# Altium PCB pcb.PCBDOC (part 1 of 2)
Units mil, origin at the board's own origin, x right, y up, seen from the top; angles counter-clockwise.
Board outline 6250 x 3000 mil, 6 copper layers (Top Layer, Mid-Layer 1, Internal Plane 1, Internal Plane 2, Mid-Layer 2, Bottom Layer); 199 components, 348 nets, 1713 pads, 133 vias.
Unrouted connection lines stored in the file: 1010.
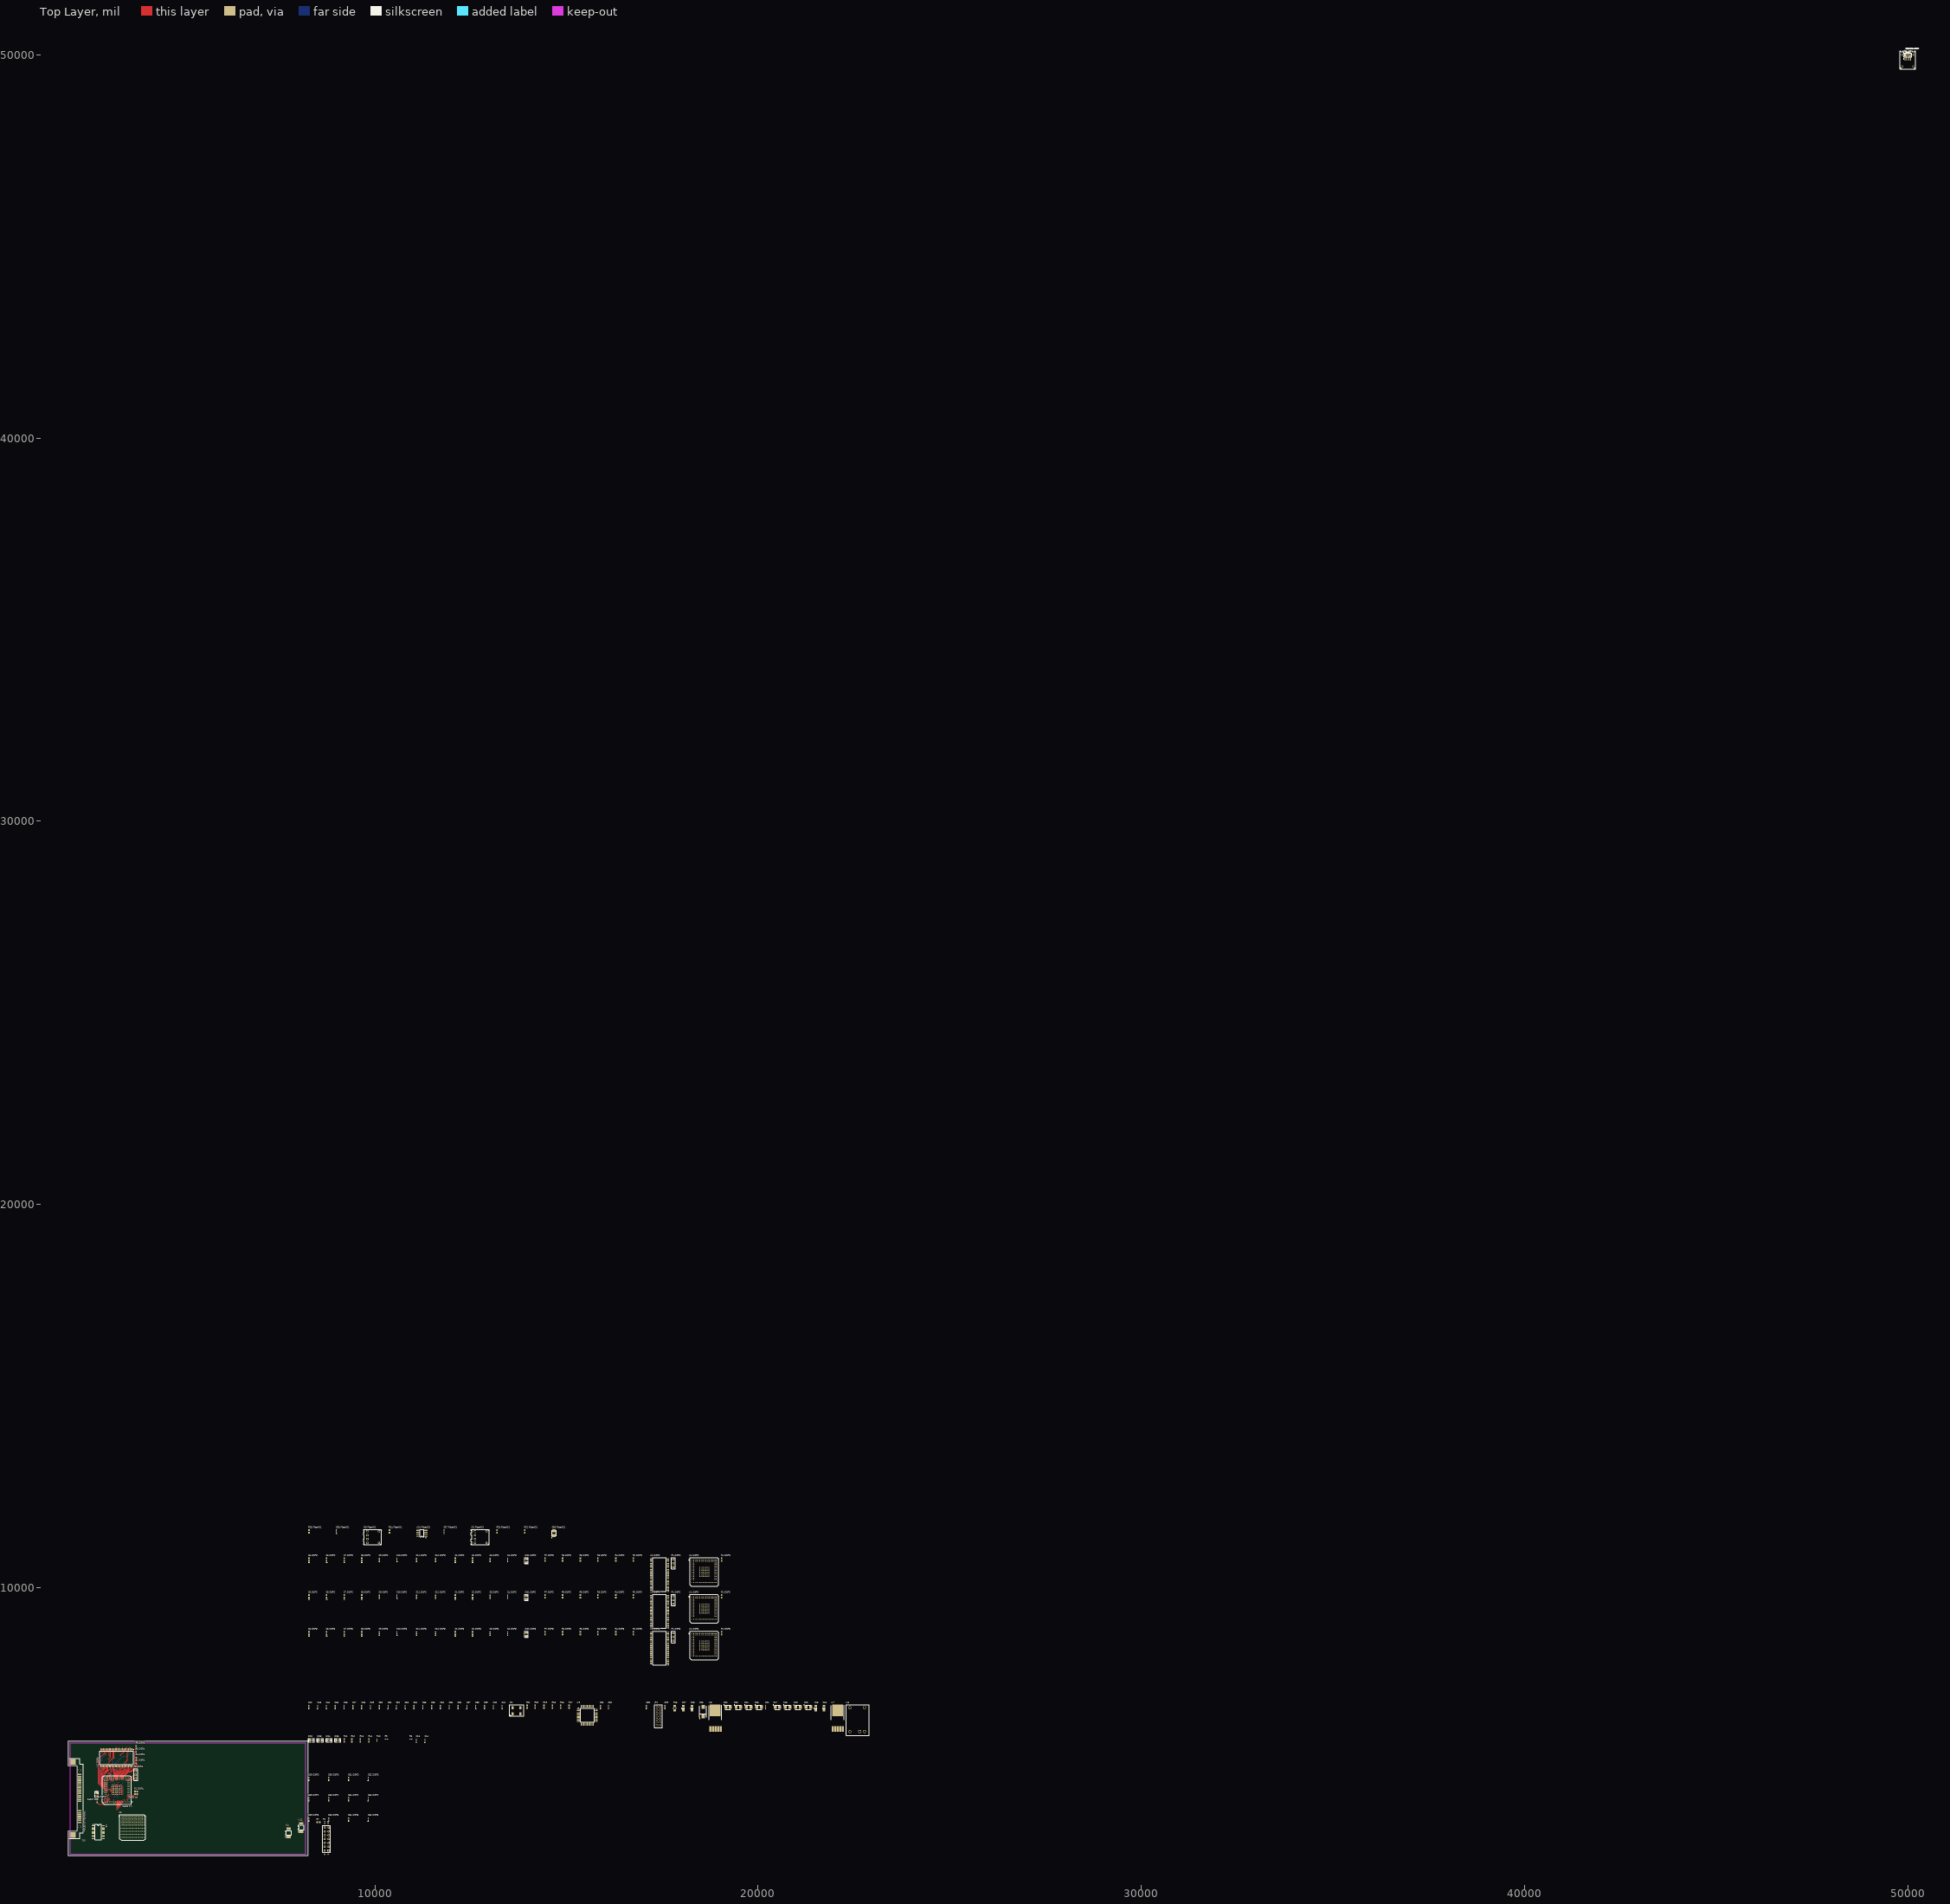
[diagram p0: Top Layer view]
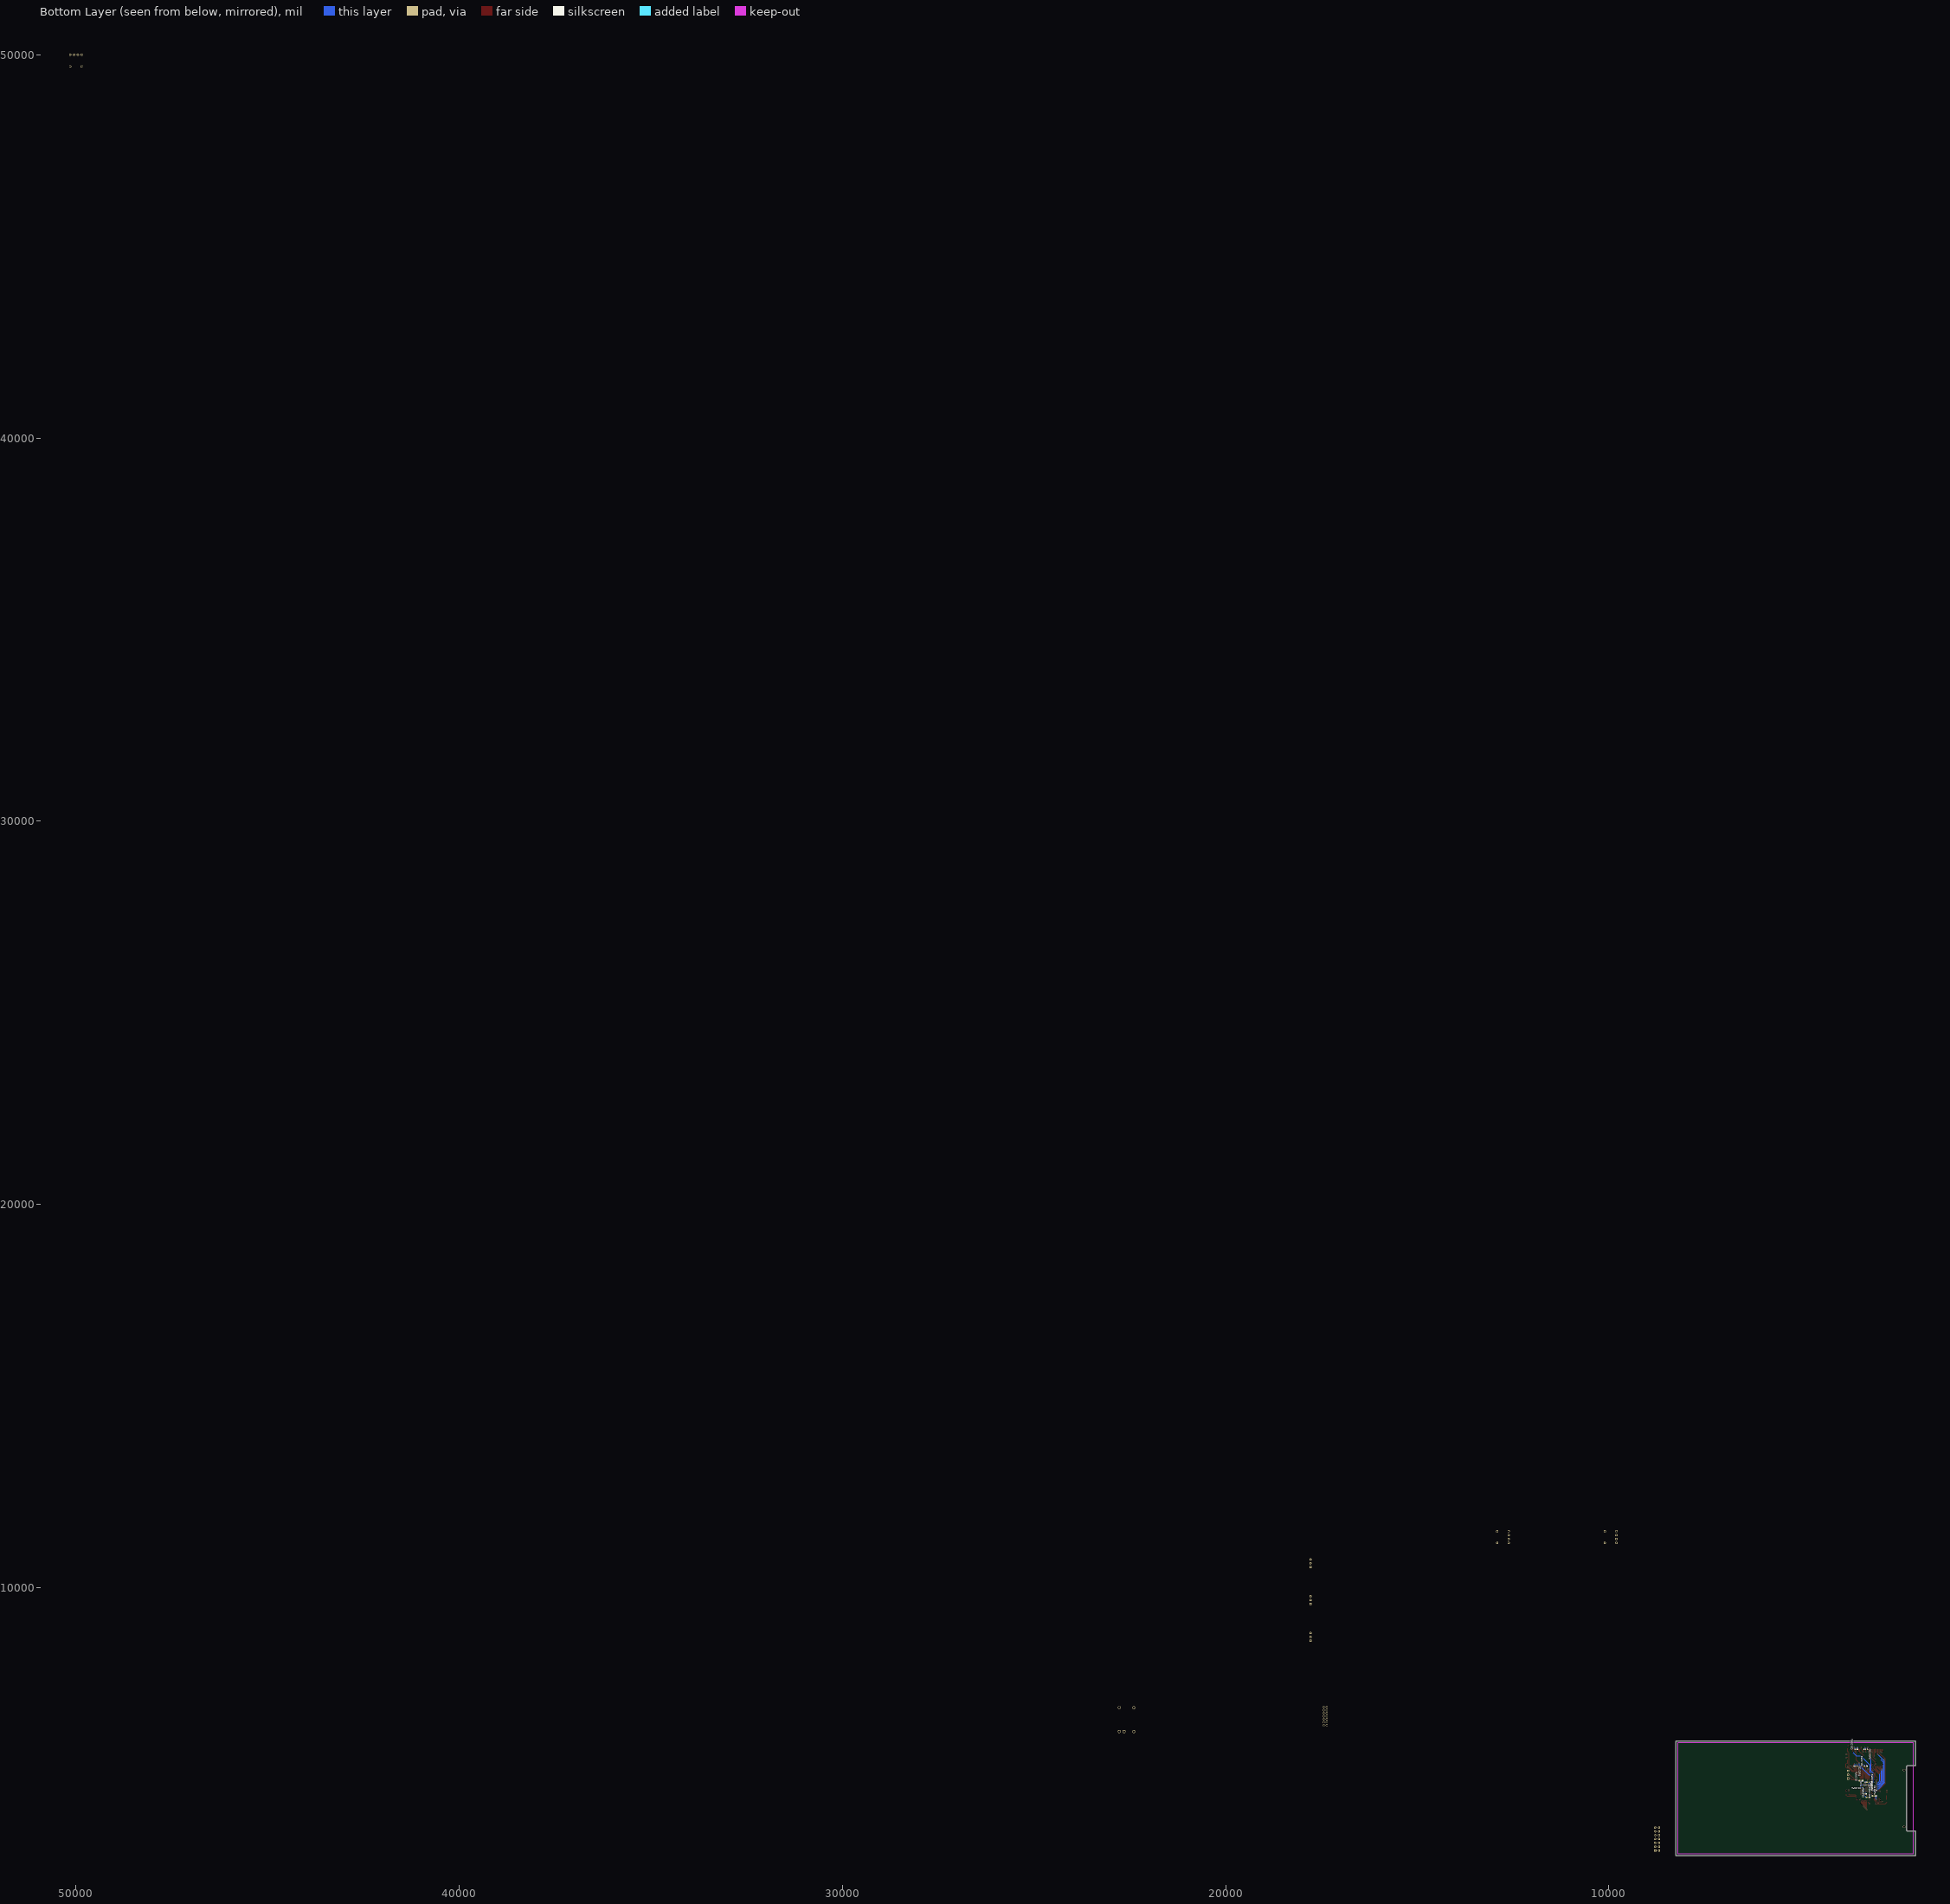
[diagram p1: Bottom Layer view, seen from below]
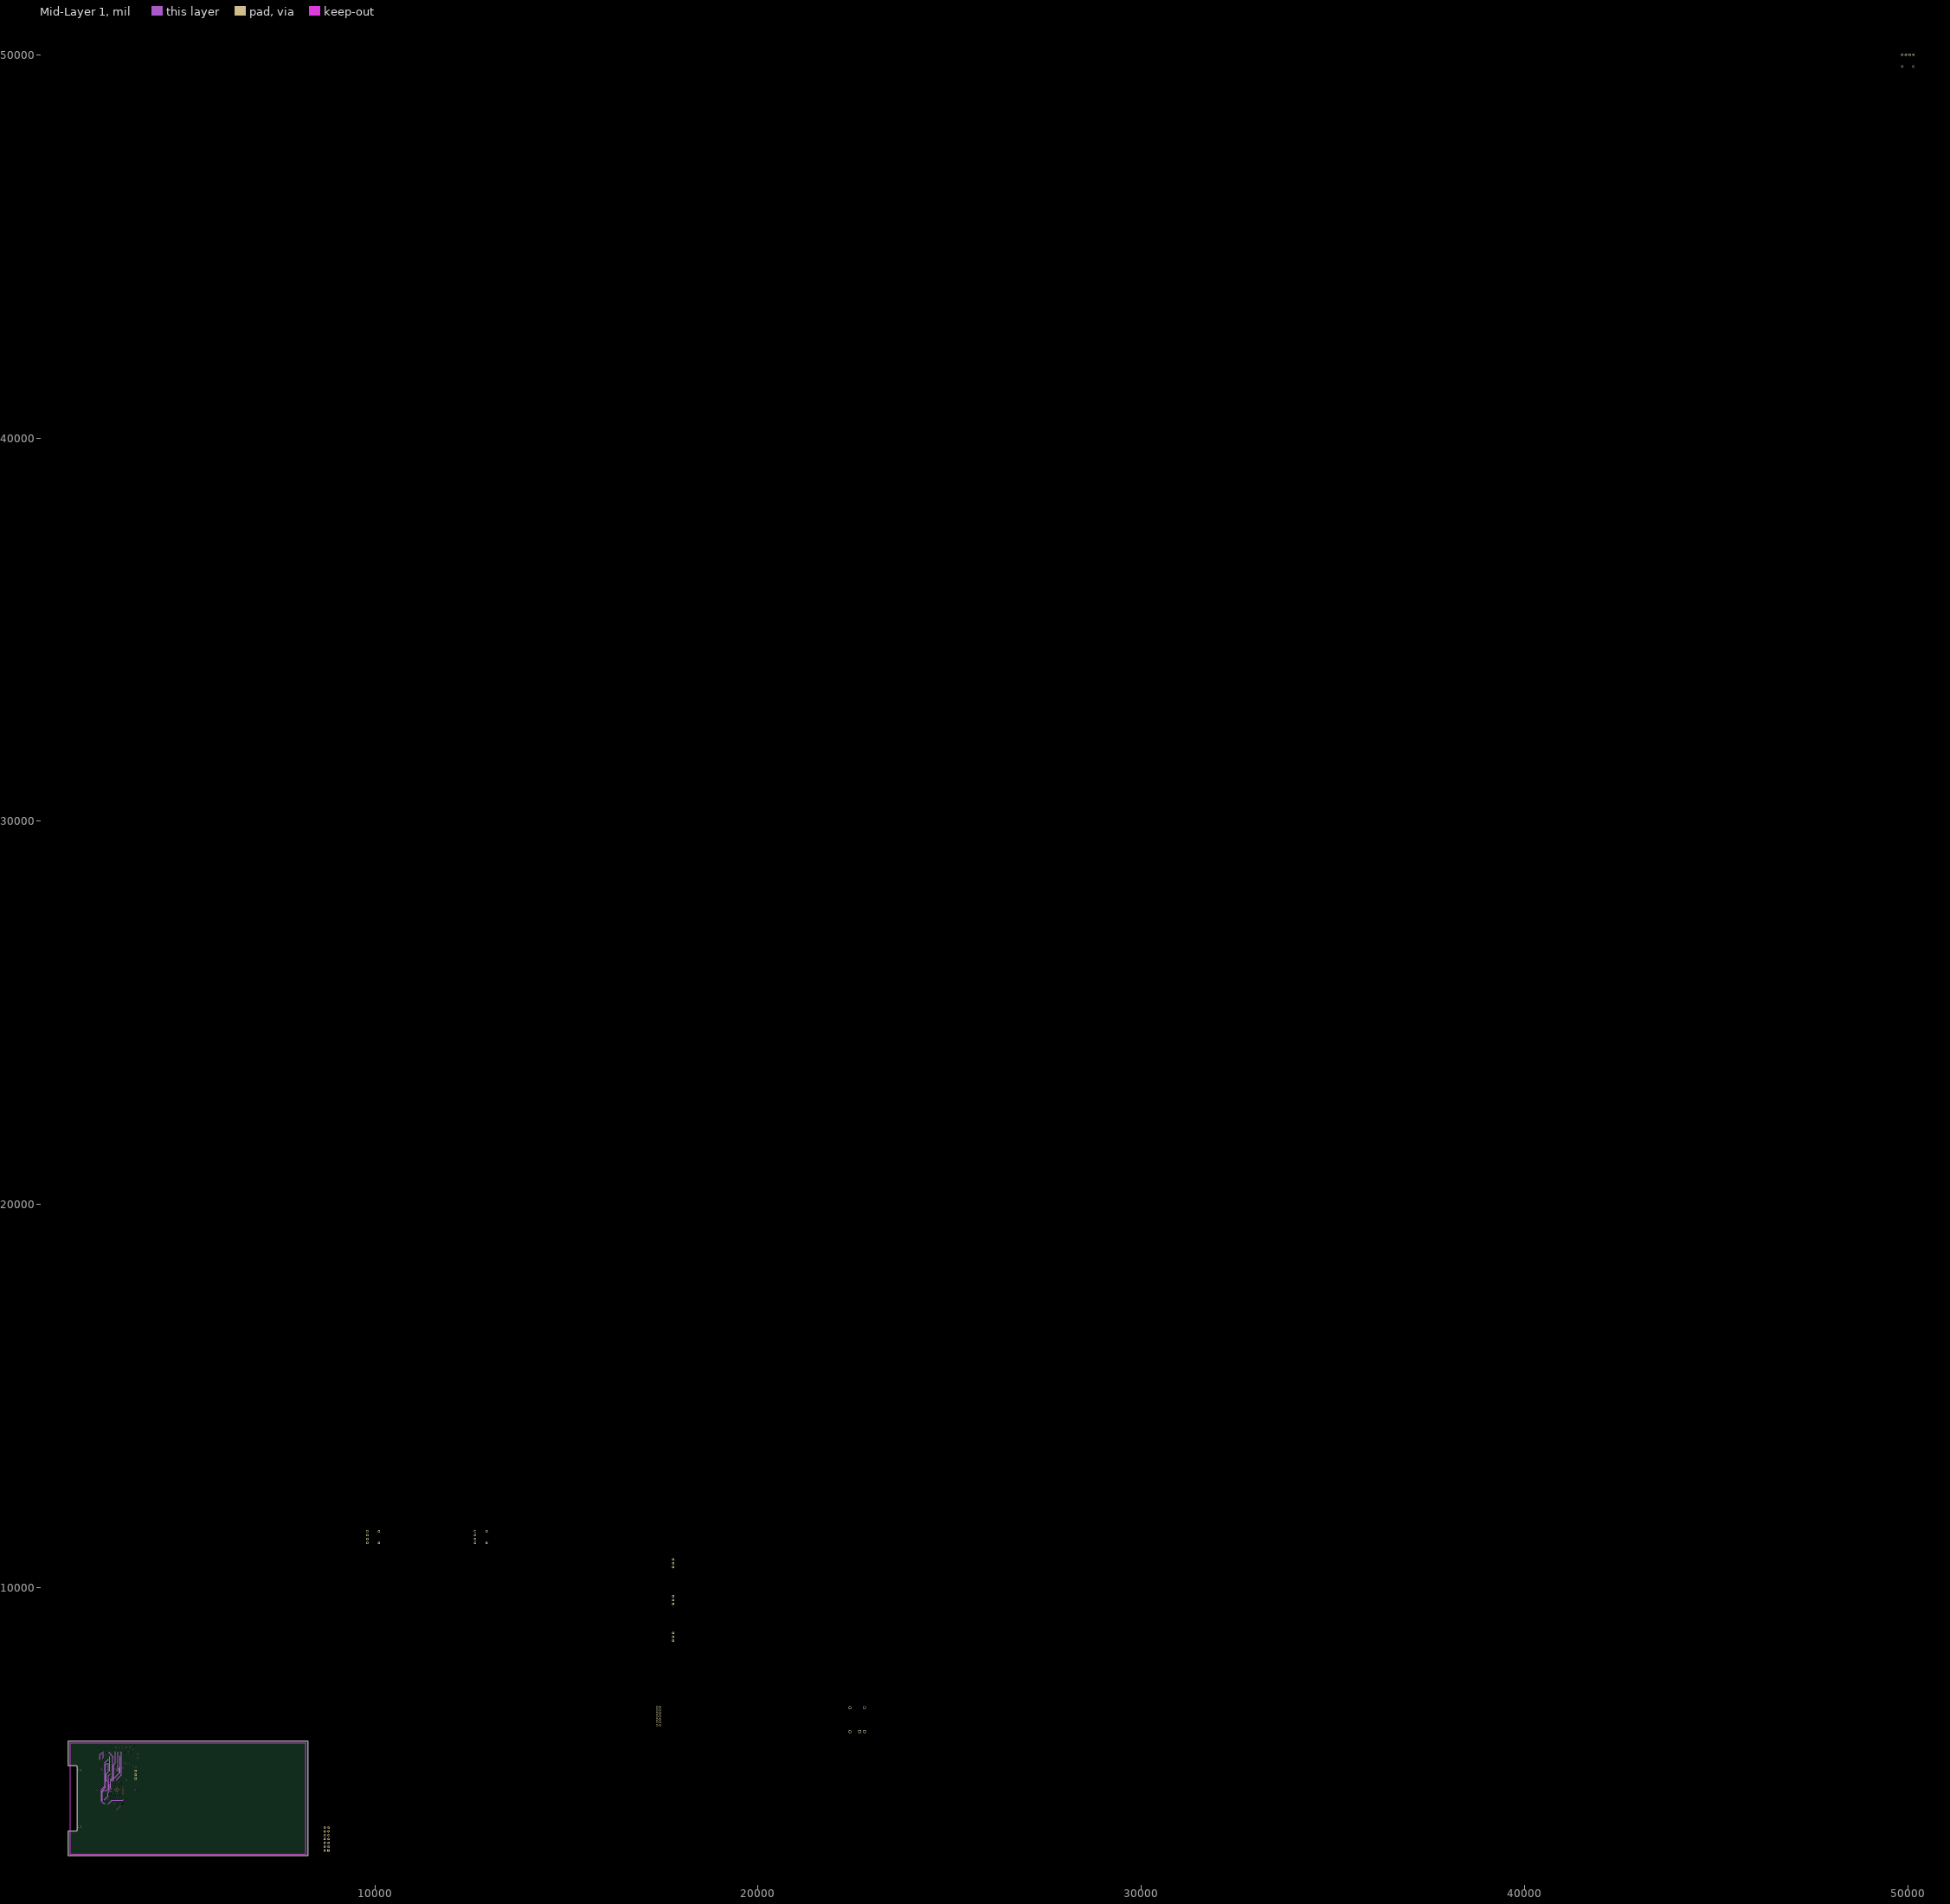
[diagram p2: Mid-Layer 1]
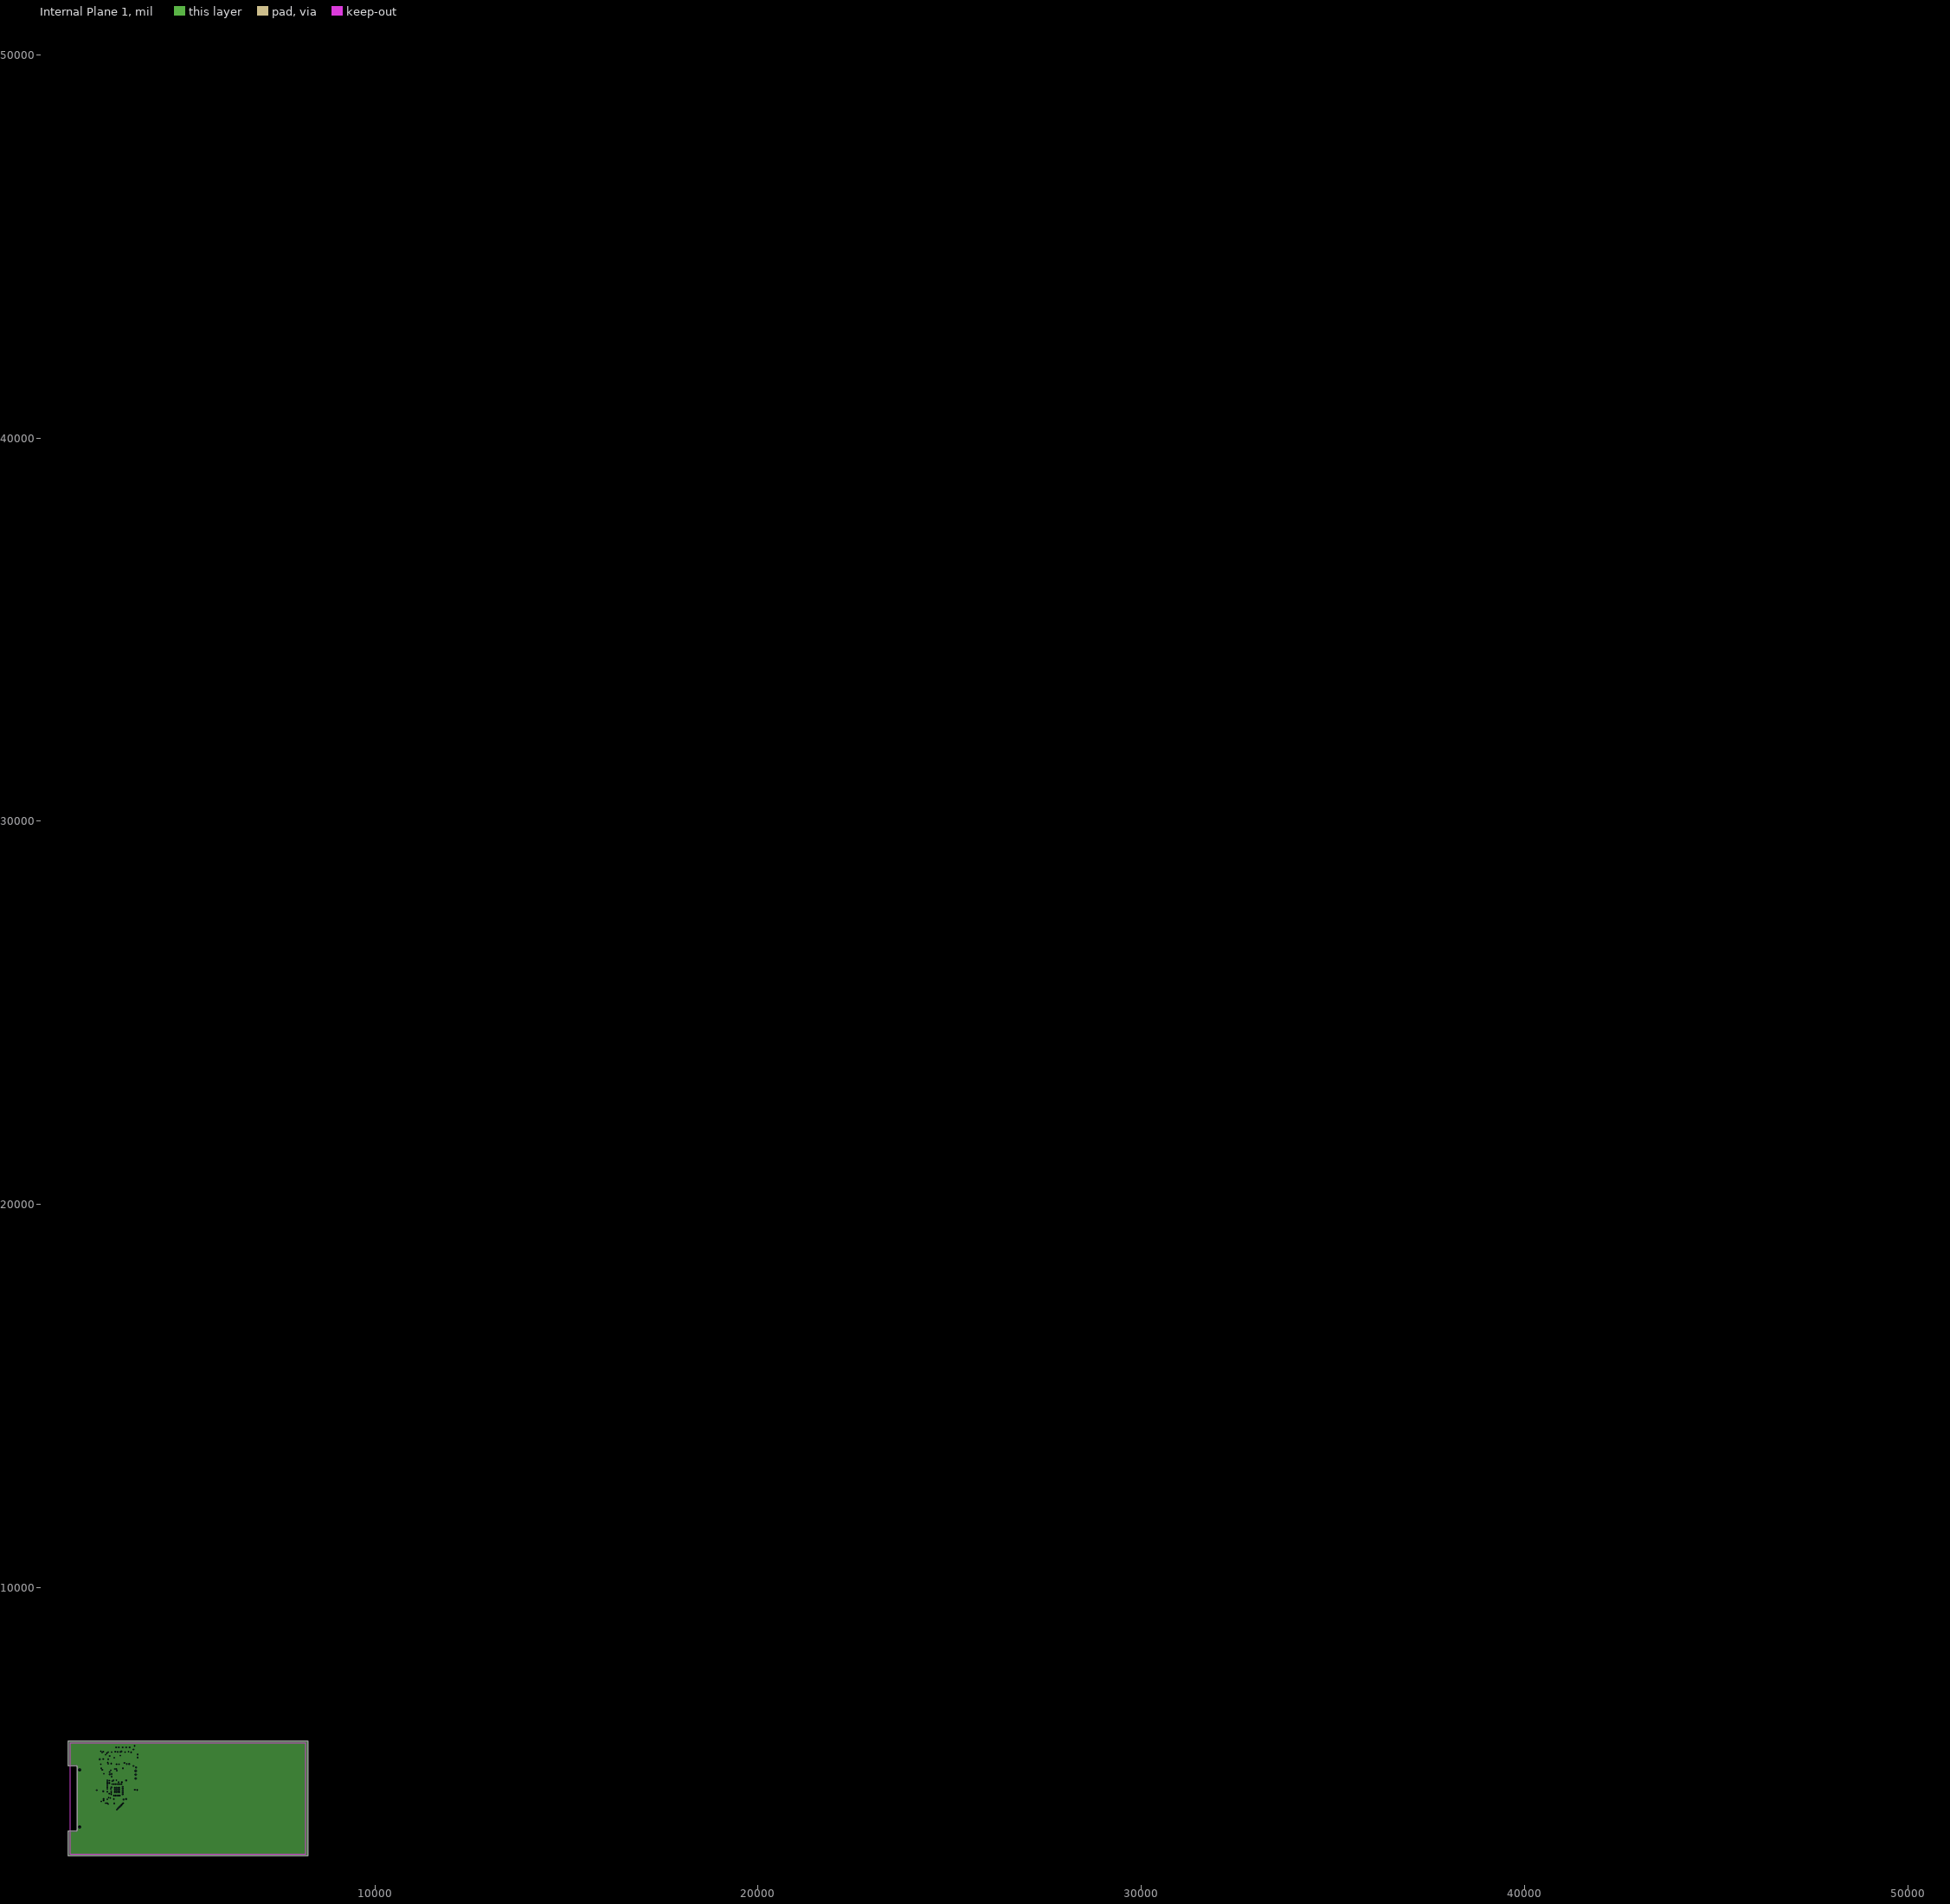
[diagram p3: Internal Plane 1, clearances drawn from the general rule]
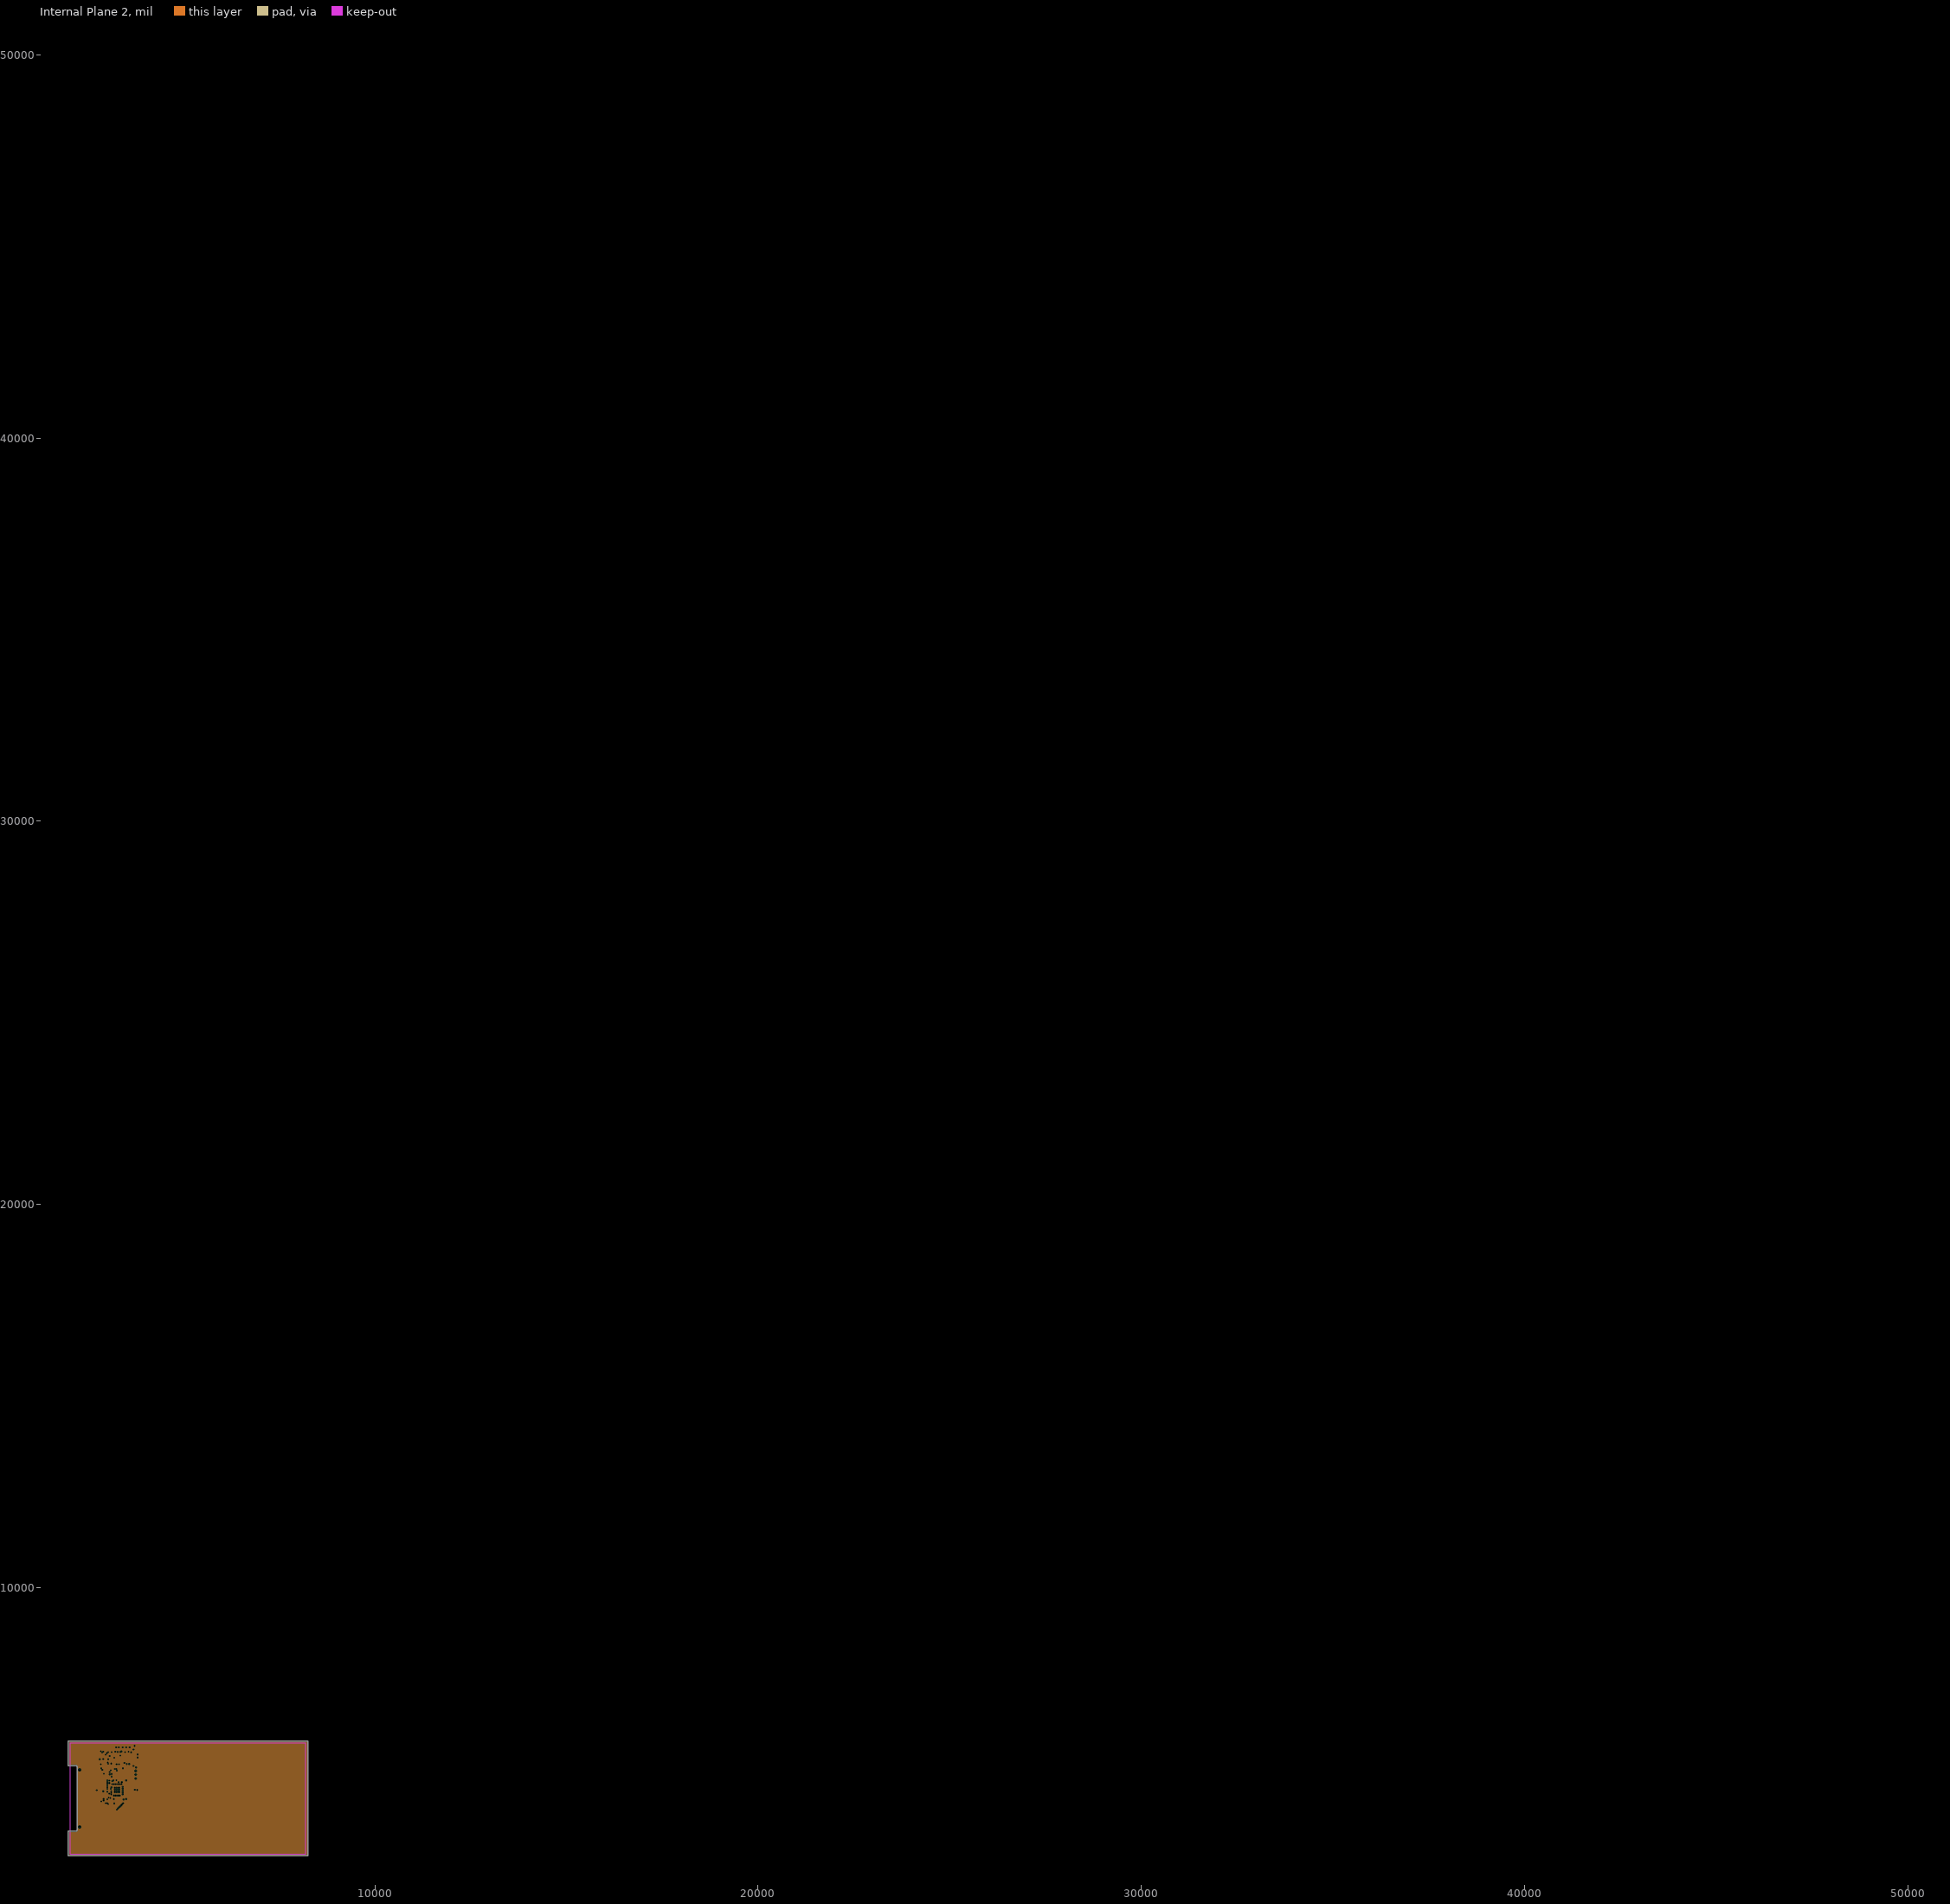
[diagram p4: Internal Plane 2, clearances drawn from the general rule]
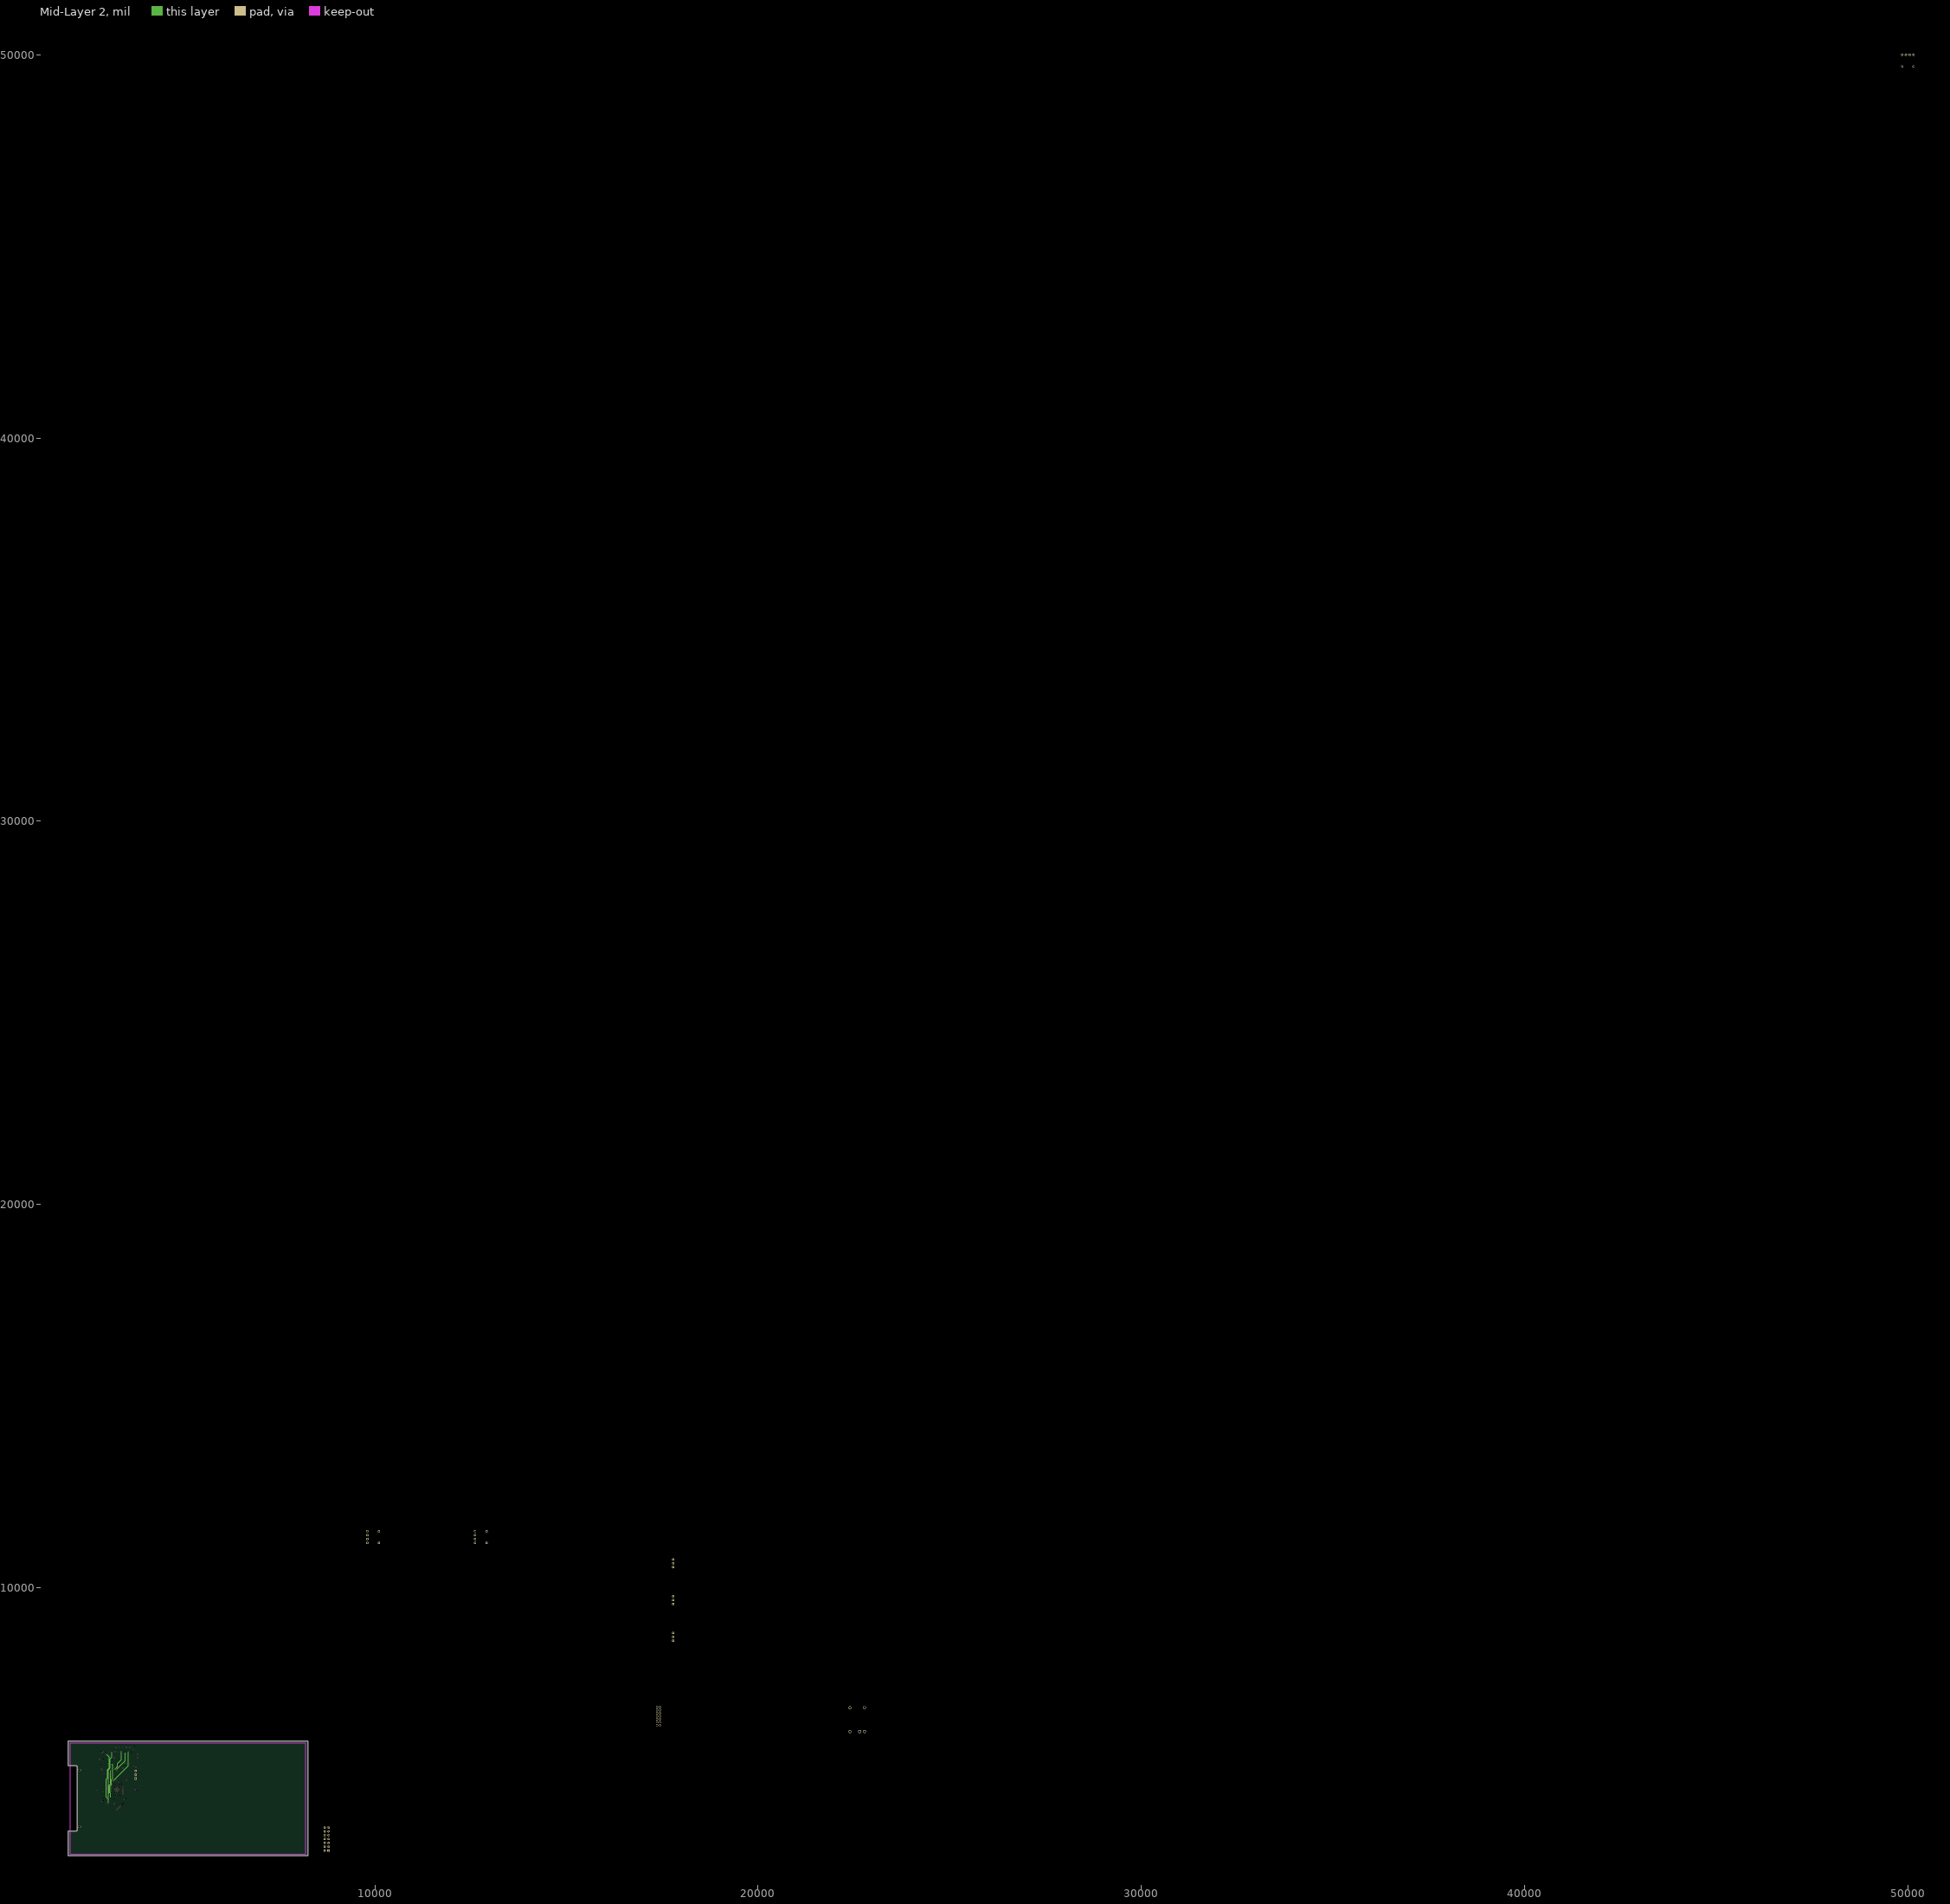
[diagram p5: Mid-Layer 2]

## Layer stack, top to bottom
Top Layer: signal copper 1.4
Dielectric: dielectric 12.6, FR-4, Dk 4.8
Mid-Layer 1: signal copper 1.4
Dielectric: dielectric 12.6, FR-4, Dk 4.8
Internal Plane 1: plane copper 1.4
Dielectric: dielectric 12.6, FR-4, Dk 4.8
Internal Plane 2: plane copper 1.4
Dielectric: dielectric 12.6, FR-4, Dk 4.8
Mid-Layer 2: signal copper 1.4
Dielectric: dielectric 12.6, FR-4, Dk 4.8
Bottom Layer: signal copper 1.4

## Board outline
2000,3000 2000,3643.11 2194.88,3643.11 ccw(c2194.88,3682.48) 2234.25,3682.48 2234.25,5317.52 ccw(c2194.88,5317.52) 2194.88,5356.89 2000,5356.89 2000,6000 8250,6000 8250,3000

## Design rules (kind name [scope] priority, off if disabled: settings)
Clearance [All] p1: gap=6
ComponentClearance [All] p1: gap=10 collisioncheckmode=3 verticalgap=10
HoleSize [All] p1: absolutevalues=TRUE maxlimit=200 minlimit=1 maxpercent=80.000 minpercent=20.000
PlaneClearance [All] p1: clearance=20
PlaneConnect [All] p1: planeconnectstyle=Relief reliefexpansion=20 reliefentries=4 reliefconductorwidth=10 reliefairgap=10
PolygonConnect [All] p1: connectstyle=Relief reliefconductorwidth=10 reliefentries=4 polygonreliefangle="90 Angle"
RoomDefinition FPGA [InComponentClass('FPGA')] p1: confinementstyle=ConfineIn formatcopy=TRUE lockcomponents=FALSE outline 8250,3005 9065,3005 9065,4010 8250,4010
RoomDefinition FiberIO1 [InComponentClass('FiberIO1')] p2: confinementstyle=ConfineIn formatcopy=TRUE lockcomponents=FALSE outline 8250,11110 15285,11110 15285,11630 8250,11630
RoomDefinition FiberIO2 [InComponentClass('FiberIO2')] p3: confinementstyle=ConfineIn formatcopy=TRUE lockcomponents=FALSE outline 49785,49615 50625,49615 50625,50215 49785,50215
RoomDefinition IO [InComponentClass('IO')] p4: confinementstyle=ConfineIn formatcopy=TRUE lockcomponents=FALSE outline 8250,3960 11950,3960 11950,6175 8250,6175
RoomDefinition PC [InComponentClass('PC')] p5: confinementstyle=ConfineIn formatcopy=TRUE lockcomponents=FALSE outline 8250,6135 22910,6135 22910,7055 8250,7055
RoomDefinition DSPA [InComponentClass('DSPA')] p6: confinementstyle=ConfineIn formatcopy=TRUE lockcomponents=FALSE outline 2690,4188.98 3835,4188.98 3835,5935 2690,5935
RoomDefinition DSPB [InComponentClass('DSPB')] p7: confinementstyle=ConfineIn formatcopy=TRUE lockcomponents=FALSE outline 8250,7965 19430,7965 19430,8975 8250,8975
RoomDefinition DSPC [InComponentClass('DSPC')] p8: confinementstyle=ConfineIn formatcopy=TRUE lockcomponents=FALSE outline 8250,8925 19430,8925 19430,9935 8250,9935
RoomDefinition DSPD [InComponentClass('DSPD')] p9: confinementstyle=ConfineIn formatcopy=TRUE lockcomponents=FALSE outline 8250,9885 19430,9885 19430,10895 8250,10895
RoutingVias [All] p1: holewidth=10 width=24 viastyle="Through Hole" minholewidth=10 minwidth=24 maxholewidth=28 maxwidth=50
SolderMaskExpansion [All] p1: expansion=4
TestPointUsage [All] p1: valid=0 allowmultiple=FALSE
Testpoint [All] p1: side=15 testpointundercomponent=TRUE minsize=40 maxsize=100 preferedsize=60 minholesize=0 maxholesize=40 preferedholesize=32 testpointgrid=1 style=1023 order=0123456789
Width [All] p1: maxlimit=50 minlimit=6 preferedwidth=8 toplayer_prefwidth=6 midlayer1_prefwidth=7 midlayer2_prefwidth=7 bottomlayer_prefwidth=7 minimp=50.000000 maximp=50.000000 favimp=50.000000
14 further rules are at their usual default settings.

## Classes and differential pairs
component class DSPD: C1.DSPD C2.DSPD C3.DSPD C4.DSPD C5.DSPD C6.DSPD C7.DSPD C8.DSPD C9.DSPD C10.DSPD C11.DSPD C12.DSPD C59.DSPD C60.DSPD C61.DSPD C62.DSPD DS1.DSPD P1.DSPD R1.DSPD R2.DSPD R3.DSPD R4.DSPD R5.DSPD R6.DSPD R7.DSPD U1.DSPD U2.DSPD
component class DSPC: C1.DSPC C2.DSPC C3.DSPC C4.DSPC C5.DSPC C6.DSPC C7.DSPC C8.DSPC C9.DSPC C10.DSPC C11.DSPC C12.DSPC C59.DSPC C60.DSPC C61.DSPC C62.DSPC DS1.DSPC P1.DSPC R1.DSPC R2.DSPC R3.DSPC R4.DSPC R5.DSPC R6.DSPC R7.DSPC U1.DSPC U2.DSPC
component class DSPB: C1.DSPB C2.DSPB C3.DSPB C4.DSPB C5.DSPB C6.DSPB C7.DSPB C8.DSPB C9.DSPB C10.DSPB C11.DSPB C12.DSPB C59.DSPB C60.DSPB C61.DSPB C62.DSPB DS1.DSPB P1.DSPB R1.DSPB R2.DSPB R3.DSPB R4.DSPB R5.DSPB R6.DSPB R7.DSPB U1.DSPB U2.DSPB
component class DSPA: C1.DSPA C2.DSPA C3.DSPA C4.DSPA C5.DSPA C6.DSPA C7.DSPA C8.DSPA C9.DSPA C10.DSPA C11.DSPA C12.DSPA C59.DSPA C60.DSPA C61.DSPA C62.DSPA DS1.DSPA P1.DSPA R1.DSPA R2.DSPA R3.DSPA R4.DSPA R5.DSPA R6.DSPA R7.DSPA U1.DSPA U2.DSPA
channel class fiber: FiberIO1 FiberIO2
component class PC: C15 C16 C17 C18 C19 C20 C21 C22 C23 C24 C25 C26 C27 C28 C29 C30 C31 C32 C33 C34 C35 C36 C37 C38 C39 C40 C41 C42 C43 C44 C45 C46 C47 C48 C49 C50 C51 C52 C53 C54 C55 JP1 O1 R15 R16 R17 R18 R19 R20 R21 U3 U6 U7 U8 U9
component class IO: C13 C14 DS2 DS3 DS4 DS5 IO1 R8 R9 R10 R11 R12 R13 R14 U5
component class FiberIO2: C56.FiberIO2 C57.FiberIO2 C58.FiberIO2 O2.FiberIO2 O3.FiberIO2 R22.FiberIO2 R23.FiberIO2 R24.FiberIO2 R25.FiberIO2 U10.FiberIO2
component class FiberIO1: C56.FiberIO1 C57.FiberIO1 C58.FiberIO1 O2.FiberIO1 O3.FiberIO1 R22.FiberIO1 R23.FiberIO1 R24.FiberIO1 R25.FiberIO1 U10.FiberIO1
channel class DSP: DSPA DSPB DSPC DSPD
net class PPI[0..7]: PPI0 PPI1 PPI2 PPI3 PPI4 PPI5 PPI6 PPI7
component class FPGA: P2 R7 U4 U11

## Components (designator, comment, footprint, x,y, rotation, side; value= is the part's Value field where it differs from the comment)
C1.DSPA "Cap" CC1608-0603 3238.19,4921.26 r180 bottom (schematic designator C1)
C1.DSPB "Cap" CC1608-0603 12100,8810 r90 top (schematic designator C1)
C1.DSPC "Cap" CC1608-0603 12100,9770 r90 top (schematic designator C1)
C1.DSPD "Cap" CC1608-0603 12100,10730 r90 top (schematic designator C1)
C2.DSPA "Cap" CC1608-0603 3082.61,4566.93 r0 bottom (schematic designator C2)
C2.DSPB "Cap" CC1608-0603 12550,8810 r90 top (schematic designator C2)
C2.DSPC "Cap" CC1608-0603 12550,9770 r90 top (schematic designator C2)
C2.DSPD "Cap" CC1608-0603 12550,10730 r90 top (schematic designator C2)
C3.DSPA "Cap" CC1005-0402 3157.54,4822.83 r180 bottom (schematic designator C3)
C3.DSPB "Cap" CC1005-0402 13005,8820 r90 top (schematic designator C3)
C3.DSPC "Cap" CC1005-0402 13005,9780 r90 top (schematic designator C3)
C3.DSPD "Cap" CC1005-0402 13005,10740 r90 top (schematic designator C3)
C4.DSPA "Cap" CC1005-0402 3053.09,4714.57 r0 bottom (schematic designator C4)
C4.DSPB "Cap" CC1005-0402 13465,8820 r90 top (schematic designator C4)
C4.DSPC "Cap" CC1005-0402 13465,9780 r90 top (schematic designator C4)
C4.DSPD "Cap" CC1005-0402 13465,10740 r90 top (schematic designator C4)
C5.DSPA "Cap" CC1608-0603 3427.1,4960.63 r0 bottom (schematic designator C5)
C5.DSPB "Cap" CC1608-0603 8280,8810 r90 top (schematic designator C5)
C5.DSPC "Cap" CC1608-0603 8280,9770 r90 top (schematic designator C5)
C5.DSPD "Cap" CC1608-0603 8280,10730 r90 top (schematic designator C5)
C6.DSPA "Cap" CC1608-0603 3248.03,4527.56 r0 bottom (schematic designator C6)
C6.DSPB "Cap" CC1608-0603 8740,8810 r90 top (schematic designator C6)
C6.DSPC "Cap" CC1608-0603 8740,9770 r90 top (schematic designator C6)
C6.DSPD "Cap" CC1608-0603 8740,10730 r90 top (schematic designator C6)
C7.DSPB "Cap" CC1608-0603 9200,8810 r90 top (schematic designator C7)
C7.DSPC "Cap" CC1608-0603 9200,9770 r90 top (schematic designator C7)
C7.DSPD "Cap" CC1608-0603 9200,10730 r90 top (schematic designator C7)
C8.DSPB "Cap" CC1608-0603 9660,8810 r90 top (schematic designator C8)
C8.DSPC "Cap" CC1608-0603 9660,9770 r90 top (schematic designator C8)
C8.DSPD "Cap" CC1608-0603 9660,10730 r90 top (schematic designator C8)
C9.DSPA "Cap" CC1005-0402 3425.2,4870.14 r270 bottom (schematic designator C9)
C9.DSPB "Cap" CC1005-0402 10115,8820 r90 top (schematic designator C9)
C9.DSPC "Cap" CC1005-0402 10115,9780 r90 top (schematic designator C9)
C9.DSPD "Cap" CC1005-0402 10115,10740 r90 top (schematic designator C9)
C10.DSPA "Cap" CC1005-0402 3366.14,4746 r90 bottom (schematic designator C10)
C10.DSPB "Cap" CC1005-0402 10575,8820 r90 top (schematic designator C10)
C10.DSPC "Cap" CC1005-0402 10575,9780 r90 top (schematic designator C10)
C10.DSPD "Cap" CC1005-0402 10575,10740 r90 top (schematic designator C10)
C11.DSPB "Cap" CC1005-0402 11085,8820 r90 top (schematic designator C11)
C11.DSPC "Cap" CC1005-0402 11085,9780 r90 top (schematic designator C11)
C11.DSPD "Cap" CC1005-0402 11085,10740 r90 top (schematic designator C11)
C12.DSPA "Cap" CC1005-0402 3326.77,4616.14 r0 bottom (schematic designator C12)
C12.DSPB "Cap" CC1005-0402 11585,8820 r90 top (schematic designator C12)
C12.DSPC "Cap" CC1005-0402 11585,9780 r90 top (schematic designator C12)
C12.DSPD "Cap" CC1005-0402 11585,10740 r90 top (schematic designator C12)
C13 "Cap" CC1005-0402 11080,6020 r90 top
C14 "Cap" CC1005-0402 11305,6020 r90 top
C15 "10uF" CC3216-1206 21500,6855 r90 top
C16 "10uF" CC3216-1206 21720,6855 r90 top
C17 "Bypass Cap" TC3528-1411 20505,6880 r0 top
C18 "Bypass Cap" TC3528-1411 20770,6880 r0 top
C19 "Bypass Cap" TC3528-1411 21040,6880 r0 top
C20 "Bypass Cap" TC3528-1411 21310,6880 r0 top
C21 "Cap" CC1005-0402 20195,6900 r90 top
C22 "Bypass Cap" TC3528-1411 19215,6880 r0 top
C23 "Bypass Cap" TC3528-1411 19485,6880 r0 top
C24 "Bypass Cap" TC3528-1411 19755,6880 r0 top
C25 "Bypass Cap" TC3528-1411 20025,6880 r0 top
C26 "A700D107M006AT" TC7343-2917 18565,6765 r90 top
C27 "10uF" CC3216-1206 18045,6855 r90 top
C28 "10uF" CC3216-1206 18275,6855 r90 top
C29 "Cap" CC1005-0402 17570,6900 r90 top
C30 "Cap" CC1005-0402 17085,6900 r90 top
C31 "Cap" CC1005-0402 15885,6900 r90 top
C32 "Cap" CC1005-0402 16095,6900 r90 top
C33 "Cap" CC1005-0402 11480,6900 r90 top
C34 "Cap" CC1005-0402 11710,6900 r90 top
C35 "Cap" CC1005-0402 11940,6900 r90 top
C36 "Cap" CC1005-0402 12170,6900 r90 top
C37 "Cap" CC1005-0402 12400,6900 r90 top
C38 "Cap" CC1005-0402 12630,6900 r90 top
C39 "Cap" CC1005-0402 12860,6900 r90 top
C40 "Cap" CC1005-0402 13090,6900 r90 top
C41 "Cap" CC1005-0402 13320,6900 r90 top
C42 "Cap" CC1005-0402 8275,6900 r90 top
C43 "Cap" CC1005-0402 8505,6900 r90 top
C44 "Cap" CC1005-0402 8735,6900 r90 top
C45 "Cap" CC1005-0402 8965,6900 r90 top
C46 "Cap" CC1005-0402 9195,6900 r90 top
C47 "Cap" CC1005-0402 9425,6900 r90 top
C48 "Cap" CC1005-0402 9655,6900 r90 top
C49 "Cap" CC1005-0402 9885,6900 r90 top
C50 "Cap" CC1005-0402 10115,6900 r90 top
C51 "Cap" CC1005-0402 10345,6900 r90 top
C52 "Cap" CC1005-0402 10560,6900 r90 top
C53 "Cap" CC1005-0402 10790,6900 r90 top
C54 "Cap" CC1005-0402 11020,6900 r90 top
C55 "Cap" CC1005-0402 11250,6900 r90 top
C56.FiberIO1 "" TC3528-1411 14675,11420 r90 top (schematic designator C56)
C56.FiberIO2 "" TC3528-1411 49999.5,49999.5 r0 top (schematic designator C56)
C57.FiberIO1 "Cap" CC1005-0402 11805,11475 r90 top (schematic designator C57)
C57.FiberIO2 "Cap" CC1005-0402 49999.5,49999.5 r0 top (schematic designator C57)
C58.FiberIO1 "Cap" CC1005-0402 8995,11475 r90 top (schematic designator C58)
C58.FiberIO2 "Cap" CC1005-0402 49999.5,49999.5 r0 top (schematic designator C58)
C59.DSPA "Cap" CC1005-0402 3551.75,5780 r0 bottom (schematic designator C59)
C59.DSPB "Cap" CC1005-0402 8275,3960 r90 top (schematic designator C59)
C59.DSPC "Cap" CC1005-0402 8275,4490 r90 top (schematic designator C59)
C59.DSPD "Cap" CC1005-0402 8275,5020 r90 top (schematic designator C59)
C60.DSPA "Cap" CC1005-0402 3280,5780 r180 bottom (schematic designator C60)
C60.DSPB "Cap" CC1005-0402 8795,3960 r90 top (schematic designator C60)
C60.DSPC "Cap" CC1005-0402 8795,4490 r90 top (schematic designator C60)
C60.DSPD "Cap" CC1005-0402 8795,5020 r90 top (schematic designator C60)
C61.DSPA "Cap" CC1005-0402 3300,5340 r0 bottom (schematic designator C61)
C61.DSPB "Cap" CC1005-0402 9315,3960 r90 top (schematic designator C61)
C61.DSPC "Cap" CC1005-0402 9315,4490 r90 top (schematic designator C61)
C61.DSPD "Cap" CC1005-0402 9315,5020 r90 top (schematic designator C61)
C62.DSPA "Cap" CC1005-0402 3548.25,5340 r180 bottom (schematic designator C62)
C62.DSPB "Cap" CC1005-0402 9825,3960 r90 top (schematic designator C62)
C62.DSPC "Cap" CC1005-0402 9825,4490 r90 top (schematic designator C62)
C62.DSPD "Cap" CC1005-0402 9825,5020 r90 top (schematic designator C62)
DS1.DSPA "LED?" "SMD _LED" 2746.06,4606.3 r270 top (schematic designator DS1)
DS1.DSPB "LED?" "SMD _LED" 13960,8785 r90 top (schematic designator DS1)
DS1.DSPC "LED?" "SMD _LED" 13960,9745 r90 top (schematic designator DS1)
DS1.DSPD "LED?" "SMD _LED" 13960,10705 r90 top (schematic designator DS1)
DS2 "LED3" "SMD _LED" 8345,6020 r0 top
DS3 "LED3" "SMD _LED" 8575,6020 r0 top
DS4 "LED3" "SMD _LED" 8805,6020 r0 top
DS5 "LED3" "SMD _LED" 9035,6020 r0 top
IO1 "SATA 23-pin header" "MOLEX 87703-0001" 2297.24,4500 r270 top
JP1 "Header 7X2" HDR2x7-2mm 17440,6410 r0 top
O1 "OSC2" ECS-3953M 13595,6705 r0 top
O2.FiberIO1 "HFBR-1528" HPVL 12615,11320 r90 top (schematic designator O2)
O2.FiberIO2 "HFBR-1528" HPVL 49999.5,49999.5 r0 top (schematic designator O2)
O3.FiberIO1 "HFBR-2528" HPVL 9805,11320 r90 top (schematic designator O3)
O3.FiberIO2 "HFBR-2528" HPVL 49999.5,49999.5 r0 top (schematic designator O3)
P1.DSPA "Header 3" HDR1X3 3760,5020 r90 top (schematic designator P1)
P1.DSPB "Header 3" HDR1X3 17785,8615 r90 top (schematic designator P1)
P1.DSPC "Header 3" HDR1X3 17785,9575 r90 top (schematic designator P1)
P1.DSPD "Header 3" HDR1X3 17785,10535 r90 top (schematic designator P1)
P2 "Header 7X2" HDR2X7 8790,3140 r90 top
R1.DSPA "4.7k" CR1608-0603 3740.16,4645.67 r90 top (schematic designator R1)
R1.DSPB "4.7k" CR1608-0603 19045,8810 r90 top (schematic designator R1)
R1.DSPC "4.7k" CR1608-0603 19045,9770 r90 top (schematic designator R1)
R1.DSPD "4.7k" CR1608-0603 19045,10730 r90 top (schematic designator R1)
R2.DSPA "Res1" CR1608-0603 3769.68,5383.86 r90 top (schematic designator R2)
R2.DSPB "Res1" CR1608-0603 16745,8810 r90 top (schematic designator R2)
R2.DSPC "Res1" CR1608-0603 16745,9770 r90 top (schematic designator R2)
R2.DSPD "Res1" CR1608-0603 16745,10730 r90 top (schematic designator R2)
R3.DSPA "Res1" CR1608-0603 3769.68,5679.13 r90 top (schematic designator R3)
R3.DSPB "Res1" CR1608-0603 15820,8810 r90 top (schematic designator R3)
R3.DSPC "Res1" CR1608-0603 15820,9770 r90 top (schematic designator R3)
R3.DSPD "Res1" CR1608-0603 15820,10730 r90 top (schematic designator R3)
R4.DSPA "Res1" CR1608-0603 3769.68,5531.5 r90 top (schematic designator R4)
R4.DSPB "Res1" CR1608-0603 16285,8810 r90 top (schematic designator R4)
R4.DSPC "Res1" CR1608-0603 16285,9770 r90 top (schematic designator R4)
R4.DSPD "Res1" CR1608-0603 16285,10730 r90 top (schematic designator R4)
R5.DSPA "Res1" CR1608-0603 3769.68,5836.61 r90 top (schematic designator R5)
R5.DSPB "Res1" CR1608-0603 15360,8810 r90 top (schematic designator R5)
R5.DSPC "Res1" CR1608-0603 15360,9770 r90 top (schematic designator R5)
R5.DSPD "Res1" CR1608-0603 15360,10730 r90 top (schematic designator R5)
R6.DSPA "Res1" CR1608-0603 2755.91,4429.13 r90 top (schematic designator R6)
R6.DSPB "Res1" CR1608-0603 14900,8810 r90 top (schematic designator R6)
R6.DSPC "Res1" CR1608-0603 14900,9770 r90 top (schematic designator R6)
R6.DSPD "Res1" CR1608-0603 14900,10730 r90 top (schematic designator R6)
R7 "4.7k" CR1608-0603 8525,3880 r0 top
R7.DSPA "4.7k" CR1608-0603 3799.21,4645.67 r270 top (schematic designator R7)
R7.DSPB "4.7k" CR1608-0603 14440,8810 r90 top (schematic designator R7)
R7.DSPC "4.7k" CR1608-0603 14440,9770 r90 top (schematic designator R7)
R7.DSPD "4.7k" CR1608-0603 14440,10730 r90 top (schematic designator R7)
R8 "100" CR1005-0402 10940,6050 r0 top
R9 "100" CR1005-0402 10305,6050 r0 top
R10 "100" CR1005-0402 10055,6020 r90 top
R11 "Res1" CR1608-0603 9200,6010 r90 top
R12 "Res1" CR1608-0603 9400,6010 r90 top
R13 "Res1" CR1608-0603 9620,6010 r90 top
R14 "Res1" CR1608-0603 9845,6010 r90 top
R15 "Res1" CR3216-1206 17825,6855 r90 top
R16 "current-limiting series res" CR1608-0603 14850,6890 r90 top
R17 "current-limiting series res" CR1608-0603 15070,6890 r90 top
R18 "current-limiting series res" CR1608-0603 14630,6890 r90 top
R19 "current-limiting series res" CR1608-0603 14410,6890 r90 top
R20 "current-limiting series res" CR1608-0603 14180,6890 r90 top
R21 "current-limiting series res" CR1608-0603 13970,6890 r90 top
R22.FiberIO1 "Res1" CR1608-0603 13910,11465 r90 top (schematic designator R22)
R22.FiberIO2 "Res1" CR1608-0603 49999.5,49999.5 r0 top (schematic designator R22)
R23.FiberIO1 "Res1" CR1608-0603 13190,11465 r90 top (schematic designator R23)
R23.FiberIO2 "Res1" CR1608-0603 49999.5,49999.5 r0 top (schematic designator R23)
R24.FiberIO1 "Res1" CR1608-0603 10380,11465 r90 top (schematic designator R24)
R24.FiberIO2 "Res1" CR1608-0603 49999.5,49999.5 r0 top (schematic designator R24)
R25.FiberIO1 "Res1" CR1608-0603 8280,11465 r90 top (schematic designator R25)
R25.FiberIO2 "Res1" CR1608-0603 49999.5,49999.5 r0 top (schematic designator R25)
U1.DSPA "Blackfin BF533-PGBA169" "AD PBGA-169" 3267.72,4724.41 r180 top locked (schematic designator U1)
U1.DSPB "Blackfin BF533-PGBA169" "AD PBGA-169" 18595,8490 r0 top (schematic designator U1)
U1.DSPC "Blackfin BF533-PGBA169" "AD PBGA-169" 18595,9450 r0 top (schematic designator U1)
U1.DSPD "Blackfin BF533-PGBA169" "AD PBGA-169" 18595,10410 r0 top (schematic designator U1)
U2.DSPA "16Mx16 SDRAM" SO-G54/X.5 3260,5560 r180 top (schematic designator U2)
U2.DSPB "16Mx16 SDRAM" SO-G54/X.5 17430,8425 r90 top (schematic designator U2)
U2.DSPC "16Mx16 SDRAM" SO-G54/X.5 17430,9385 r90 top (schematic designator U2)
U2.DSPD "16Mx16 SDRAM" SO-G54/X.5 17430,10345 r90 top (schematic designator U2)
U3 "Xilinx XC3S200-FT256" "Xilinx FT256 BGA" 3680,3740 r0 top
U4 "*" TSSO4x6-G14 7746.06,3602.36 r0 top
U5 "DS92LV1224" SSO-G28/E4.3 2780,3620 r270 top
U6 "PTH03000WAH" "TI EUS" 22400,6245 r90 top
U7 "TPS78618 1.8 V" KTT 21950,6285 r0 top
U8 "TPS78625 2.5 V" KTT 18755,6285 r0 top
U9 "Xilinx CoolRunner-II XC2C64A" QFP10x10-G44/G10N 15545,6670 r0 top
U10.FiberIO1 "SN75451BD" SO-G8/E2.5 11225,11420 r90 top (schematic designator U10)
U10.FiberIO2 "SN75451BD" SO-G8/E2.5 49999.5,49999.5 r0 top (schematic designator U10)
U11 "*" TSSO4x6-G14 8080.71,3740.16 r0 top

## Footprints (in the part's own frame and the unit in brackets; to place one, negate y for a bottom-side part, rotate by r counter-clockwise, add the part's x,y. Pads: shape width x height; smd on the part's side, far side on the other; paste and mask are expansions set on the pad)
"AD PBGA-169" [mm] "BGA, Mini Plastic; 169 Balls; Body 19 x 19 mm; Pitch 1 mm"
  round 0.5 smd: A1(-8,8) A2(-7,8) A3(-6,8) A4(-5,8) A5(-4,8) A6(-3,8) A7(-2,8) A8(-1,8) A9(0,8) A10(1,8) A11(2,8) A12(3,8) A13(4,8) A14(5,8) A15(6,8) A16(7,8) A17(8,8) B1(-8,7) B2(-7,7) B3(-6,7) B4(-5,7) B5(-4,7) B6(-3,7) B7(-2,7) B8(-1,7) B9(0,7) B10(1,7) B11(2,7) B12(3,7) B13(4,7) B14(5,7) B15(6,7) B16(7,7) B17(8,7) C1(-8,6) C2(-7,6) C16(7,6) C17(8,6) D1(-8,5) D2(-7,5) D16(7,5) D17(8,5) E1(-8,4) E2(-7,4) E16(7,4) E17(8,4) F1(-8,3) F2(-7,3) F6(-3,3) F7(-2,3) F8(-1,3) F9(0,3) F10(1,3) F11(2,3) F12(3,3) F16(7,3) F17(8,3) G1(-8,2) G2(-7,2) G6(-3,2) G7(-2,2) G8(-1,2) G9(0,2) G10(1,2) G11(2,2) G12(3,2) G16(7,2) G17(8,2) H1(-8,1) H2(-7,1) H6(-3,1) H7(-2,1) H8(-1,1) H9(0,1) H10(1,1) H11(2,1) H12(3,1) H16(7,1) H17(8,1) J1(-8,0) J2(-7,0) J6(-3,0) J7(-2,0) J8(-1,0) J9(0,0) J10(1,0) J11(2,0) J12(3,0) J16(7,0) J17(8,0) K1(-8,-1) K2(-7,-1) K6(-3,-1) K7(-2,-1) K8(-1,-1) K9(0,-1) K10(1,-1) K11(2,-1) K12(3,-1) K16(7,-1) K17(8,-1) L1(-8,-2) L2(-7,-2) L6(-3,-2) L7(-2,-2) L8(-1,-2) L9(0,-2) L10(1,-2) L11(2,-2) L12(3,-2) L16(7,-2) L17(8,-2) M1(-8,-3) M2(-7,-3) M6(-3,-3) M7(-2,-3) M8(-1,-3) M9(0,-3) M10(1,-3) M11(2,-3) M12(3,-3) M16(7,-3) M17(8,-3) N1(-8,-4) N2(-7,-4) N16(7,-4) N17(8,-4) P1(-8,-5) P2(-7,-5) P16(7,-5) P17(8,-5) R1(-8,-6) R2(-7,-6) R16(7,-6) R17(8,-6) T1(-8,-7) T2(-7,-7) T3(-6,-7) T4(-5,-7) T5(-4,-7) T6(-3,-7) T7(-2,-7) T8(-1,-7) T9(0,-7) T10(1,-7) T11(2,-7) T12(3,-7) T13(4,-7) T14(5,-7) T15(6,-7) T16(7,-7) T17(8,-7) U1(-8,-8) U2(-7,-8) U3(-6,-8) U4(-5,-8) U5(-4,-8) U6(-3,-8) U7(-2,-8) U8(-1,-8) U9(0,-8) U10(1,-8) U11(2,-8) U12(3,-8) U13(4,-8) U14(5,-8) U15(6,-8) U16(7,-8) U17(8,-8)
  silkscreen extent -10.28,-9.5 9.5,9.5
CC1005-0402 [mm] "Chip Capacitor; Body 1.0 x 0.5 mm (LxW typ)"
  rect 0.9x0.7 smd: 1(-0.65,0) 2(0.65,0)
  silkscreen extent -1.4,-0.25 -1.4,0.25
CC1608-0603 [mm] "Chip Capacitor; Body 1.6 x 0.8 mm (LxW typ)"
  rect 1.1x1 smd: 1(-0.85,0) 2(0.85,0)
  silkscreen extent -1.7,-0.4 -1.7,0.4
CC3216-1206 [mm] "Chip Capacitor; Body 3.2 x 1.6 mm (LxW typ)"
  rect 1.6x1.8 smd: 1(-1.4,0) 2(1.4,0)
  silkscreen extent -0.3,-0.8 0.3,0.8
CR1005-0402 [mm] "Chip Resistor; Body 1.1 x 0.5 mm (LxW typ)"
  rect 0.9x0.7 smd: 1(-0.65,0) 2(0.65,0)
CR1608-0603 [mm] "Chip Resistor; Body 1.6 x 0.8 mm (LxW typ)"
  rect 1.1x1 smd: 1(-0.85,0) 2(0.85,0)
CR3216-1206 [mm] "Chip Resistor; Body 3.2 x 1.6 mm (LxW typ)"
  rect 1.6x1.8 smd: 1(-1.4,0) 2(1.4,0)
  silkscreen extent -0.3,-0.8 0.3,0.8
ECS-3953M [mm] "ECS SMD CLOCK OSCILLATOR"
  rect 1.4x2 smd: 1(0,0) 2(5.08,0) 3(5.08,4.2) 4(0,4.2)
  silkscreen extent -2,-1.5 7.5,6
HDR1X3 [mm] "Connector; Header; 3 Position"
  rect 1.5x1.5 hole 0.9: 1(0,0)
  round 1.5 hole 0.9: 2(2.54,0) 3(5.08,0)
  silkscreen extent -1.27,-1.27 6.35,1.27
HDR2X7 [mm] "Connector; Header; 7x2 Position"
  rect 1.5x1.5 hole 0.9: 1(0,0)
  round 1.5 hole 0.9: 2(0,2.54) 3(2.54,0) 4(2.54,2.54) 5(5.08,0) 6(5.08,2.54) 7(7.62,0) 8(7.62,2.54) 9(10.16,0) 10(10.16,2.54) 11(12.7,0) 12(12.7,2.54) 13(15.24,0) 14(15.24,2.54)
  silkscreen extent -1.27,-1.27 16.51,3.81
HDR2x7-2mm [mm]
  round 1.5 hole 1: 1(0,0) 2(-2,0) 3(0,2) 4(-2,2) 5(0,4) 6(-2,4) 7(0,6) 8(-2,6) 9(0,8) 10(-2,8) 11(0,10) 12(-2,10) 13(0,12) 14(-2,12)
  silkscreen extent -3.5,-1.5 1.5,13.5
HPVL [mil]
  round 60 hole 40: 1(150,0) 2(50,0) 3(-50,0) 4(-150,0) 5(-150,-300) 8(150,-300)
  silkscreen extent -200,-370 200,100
KTT [mil] "TI DDPAK-5"
  rect 50x150 smd: 1(0,25) 2(67,25) 3(134,25) 4(201,25) 5(268,25)
  rect 290x300 smd: 3(125,510)
  silkscreen extent -40,260 290,645
"MOLEX 87703-0001" [mm] "Molex 1.27mm pitch SATA device plug, 2.5\" drive, without jumper, 22 circuits"
  rect 3.66x4.4 smd: 0(-24.15,-4.8) 0(24.15,-4.8)
  round 1.524 hole 1.346: 0(-18.865,0) 0(18.865,0)
  rect 0.9x2.1 smd: 1(15.875,0) 2(14.605,0) 3(13.335,0) 4(12.065,0) 5(10.795,0) 6(9.525,0) 7(8.255,0) P1(1.905,0) P2(0.635,0) P3(-0.635,0) P4(-1.905,0) P5(-3.175,0) P6(-4.445,0) P7(-5.715,0) P8(-6.985,0) P9(-8.255,0) P10(-9.525,0) P11(-10.795,0) P12(-12.065,0) P13(-13.335,0) P14(-14.605,0) P15(-15.875,0)
  silkscreen extent -26.54,-6.98 26.54,2.54
QFP10x10-G44/G10N [mm] "QFP, Metric; 44 Leads; Body 10 x 10 mm; Pitch 0.8 mm"
  rect 1.9x0.5 smd: 1(-5.95,4) 2(-5.95,3.2) 3(-5.95,2.4) 4(-5.95,1.6) 5(-5.95,0.8) 6(-5.95,0) 7(-5.95,-0.8) 8(-5.95,-1.6) 9(-5.95,-2.4) 10(-5.95,-3.2) 11(-5.95,-4) 23(5.95,-4) 24(5.95,-3.2) 25(5.95,-2.4) 26(5.95,-1.6) 27(5.95,-0.8) 28(5.95,0) 29(5.95,0.8) 30(5.95,1.6) 31(5.95,2.4) 32(5.95,3.2) 33(5.95,4)
  rect 0.5x1.9 smd: 12(-4,-5.95) 13(-3.2,-5.95) 14(-2.4,-5.95) 15(-1.6,-5.95) 16(-0.8,-5.95) 17(0,-5.95) 18(0.8,-5.95) 19(1.6,-5.95) 20(2.4,-5.95) 21(3.2,-5.95) 22(4,-5.95) 34(4,5.95) 35(3.2,5.95) 36(2.4,5.95) 37(1.6,5.95) 38(0.8,5.95) 39(0,5.95) 40(-0.8,5.95) 41(-1.6,5.95) 42(-2.4,5.95) 43(-3.2,5.95) 44(-4,5.95)
  silkscreen extent -6.07,-4.6 4.6,4.92
"SMD _LED" [mm] "SMT LED; 2 Leads"
  rect 1.3x1.6 smd: 1(0.95,0) 2(-0.95,0)
  silkscreen extent -2.13,-1.15 2,1.15
SO-G8/E2.5 [mm] "Small Outline, Plastic; 8 Leads; Body Width 3.9 mm"
  rect 0.6x2.05 smd: 1(-1.905,-2.675) 2(-0.635,-2.675) 3(0.635,-2.675) 4(1.905,-2.675) 5(1.905,2.675) 6(0.635,2.675) 7(-0.635,2.675) 8(-1.905,2.675)
  silkscreen extent -2.88,-2.8 2.5,1.25
SO-G54/X.5 [mm] "Small Outline, Plastic; 54 Leads; Body Width 10.16 mm"
  rect 0.5x1.5 smd: 1(-10.4,-5.55) 2(-9.6,-5.55) 3(-8.8,-5.55) 4(-8,-5.55) 5(-7.2,-5.55) 6(-6.4,-5.55) 7(-5.6,-5.55) 8(-4.8,-5.55) 9(-4,-5.55) 10(-3.2,-5.55) 11(-2.4,-5.55) 12(-1.6,-5.55) 13(-0.8,-5.55) 14(0,-5.55) 15(0.8,-5.55) 16(1.6,-5.55) 17(2.4,-5.55) 18(3.2,-5.55) 19(4,-5.55) 20(4.8,-5.55) 21(5.6,-5.55) 22(6.4,-5.55) 23(7.2,-5.55) 24(8,-5.55) 25(8.8,-5.55) 26(9.6,-5.55) 27(10.4,-5.55) 28(10.4,5.55) 29(9.6,5.55) 30(8.8,5.55) 31(8,5.55) 32(7.2,5.55) 33(6.4,5.55) 34(5.6,5.55) 35(4.8,5.55) 36(4,5.55) 37(3.2,5.55) 38(2.4,5.55) 39(1.6,5.55) 40(0.8,5.55) 41(0,5.55) 42(-0.8,5.55) 43(-1.6,5.55) 44(-2.4,5.55) 45(-3.2,5.55) 46(-4,5.55) 47(-4.8,5.55) 48(-5.6,5.55) 49(-6.4,5.55) 50(-7.2,5.55) 51(-8,5.55) 52(-8.8,5.55) 53(-9.6,5.55) 54(-10.4,5.55)
  silkscreen extent -11.34,-5.67 11.15,4.4
SSO-G28/E4.3 [mm] "SSOP; 28 Leads; Body Width 5.3 mm; Pitch 0.65 mm"
  rect 0.45x1.7 smd: 1(-4.225,-3.4) 2(-3.575,-3.4) 3(-2.925,-3.4) 4(-2.275,-3.4) 5(-1.625,-3.4) 6(-0.975,-3.4) 7(-0.325,-3.4) 8(0.325,-3.4) 9(0.975,-3.4) 10(1.625,-3.4) 11(2.275,-3.4) 12(2.925,-3.4) 13(3.575,-3.4) 14(4.225,-3.4) 15(4.225,3.4) 16(3.575,3.4) 17(2.925,3.4) 18(2.275,3.4) 19(1.625,3.4) 20(0.975,3.4) 21(0.325,3.4) 22(-0.325,3.4) 23(-0.975,3.4) 24(-1.625,3.4) 25(-2.275,3.4) 26(-2.925,3.4) 27(-3.575,3.4) 28(-4.225,3.4)
  silkscreen extent -5.18,-3.52 5.18,2.15
TC3528-1411 [mm] "Capacitor, SM Tantalum; Body 3.5 x 2.8 mm (LxW typ)"
  rect 2x2.2 smd: 1(-1.5,0) 2(1.5,0)
  silkscreen extent -2.82,-1.5 1.85,1.62
TC7343-2917 [mm] "Capacitor, SM Tantalum; Body 7.3 x 4.3 mm (LxW typ)"
  rect 2.6x2.4 smd: 1(-3.2,0) 2(3.2,0)
  silkscreen extent -4.57,-2.3 3.8,2.42
"TI EUS" [mil] "Package for TI PTH03000W"
  round 80 hole 60: 1(0,0) 2(0,-250) 3(0,-375) 4(625,-375) 5(620,0)
  silkscreen extent -100,-500 700,100
TSSO4x6-G14 [mm] "Shrink Small Outline; 14 Leads; Body Width 4.4 mm; Pitch 0.4 mm"
  rect 0.25x1.65 smd: 1(-1.2,-2.775) 2(-0.8,-2.775) 3(-0.4,-2.775) 4(0,-2.775) 5(0.4,-2.775) 6(0.8,-2.775) 7(1.2,-2.775) 8(1.2,2.775) 9(0.8,2.775) 10(0.4,2.775) 11(0,2.775) 12(-0.4,2.775) 13(-0.8,2.775) 14(-1.2,2.775)
  silkscreen extent -2,-2.89 1.85,1.55
"Xilinx FT256 BGA" [mm] "Xilinx BGA"
  round 0.5 smd: A1(-7.5,7.5) A2(-6.5,7.5) A3(-5.5,7.5) A4(-4.5,7.5) A5(-3.5,7.5) A6(-2.5,7.5) A7(-1.5,7.5) A8(-0.5,7.5) A9(0.5,7.5) A10(1.5,7.5) A11(2.5,7.5) A12(3.5,7.5) A13(4.5,7.5) A14(5.5,7.5) A15(6.5,7.5) A16(7.5,7.5) B1(-7.5,6.5) B2(-6.5,6.5) B3(-5.5,6.5) B4(-4.5,6.5) B5(-3.5,6.5) B6(-2.5,6.5) B7(-1.5,6.5) B8(-0.5,6.5) B9(0.5,6.5) B10(1.5,6.5) B11(2.5,6.5) B12(3.5,6.5) B13(4.5,6.5) B14(5.5,6.5) B15(6.5,6.5) B16(7.5,6.5) C1(-7.5,5.5) C2(-6.5,5.5) C3(-5.5,5.5) C4(-4.5,5.5) C5(-3.5,5.5) C6(-2.5,5.5) C7(-1.5,5.5) C8(-0.5,5.5) C9(0.5,5.5) C10(1.5,5.5) C11(2.5,5.5) C12(3.5,5.5) C13(4.5,5.5) C14(5.5,5.5) C15(6.5,5.5) C16(7.5,5.5) D1(-7.5,4.5) D2(-6.5,4.5) D3(-5.5,4.5) D4(-4.5,4.5) D5(-3.5,4.5) D6(-2.5,4.5) D7(-1.5,4.5) D8(-0.5,4.5) D9(0.5,4.5) D10(1.5,4.5) D11(2.5,4.5) D12(3.5,4.5) D13(4.5,4.5) D14(5.5,4.5) D15(6.5,4.5) D16(7.5,4.5) E1(-7.5,3.5) E2(-6.5,3.5) E3(-5.5,3.5) E4(-4.5,3.5) E5(-3.5,3.5) E6(-2.5,3.5) E7(-1.5,3.5) E8(-0.5,3.5) E9(0.5,3.5) E10(1.5,3.5) E11(2.5,3.5) E12(3.5,3.5) E13(4.5,3.5) E14(5.5,3.5) E15(6.5,3.5) E16(7.5,3.5) F1(-7.5,2.5) F2(-6.5,2.5) F3(-5.5,2.5) F4(-4.5,2.5) F5(-3.5,2.5) F6(-2.5,2.5) F7(-1.5,2.5) F8(-0.5,2.5) F9(0.5,2.5) F10(1.5,2.5) F11(2.5,2.5) F12(3.5,2.5) F13(4.5,2.5) F14(5.5,2.5) F15(6.5,2.5) F16(7.5,2.5) G1(-7.5,1.5) G2(-6.5,1.5) G3(-5.5,1.5) G4(-4.5,1.5) G5(-3.5,1.5) G6(-2.5,1.5) G7(-1.5,1.5) G8(-0.5,1.5) G9(0.5,1.5) G10(1.5,1.5) G11(2.5,1.5) G12(3.5,1.5) G13(4.5,1.5) G14(5.5,1.5) G15(6.5,1.5) G16(7.5,1.5) H1(-7.5,0.5) H2(-6.5,0.5) H3(-5.5,0.5) H4(-4.5,0.5) H5(-3.5,0.5) H6(-2.5,0.5) H7(-1.5,0.5) H8(-0.5,0.5) H9(0.5,0.5) H10(1.5,0.5) H11(2.5,0.5) H12(3.5,0.5) H13(4.5,0.5) H14(5.5,0.5) H15(6.5,0.5) H16(7.5,0.5) J1(-7.5,-0.5) J2(-6.5,-0.5) J3(-5.5,-0.5) J4(-4.5,-0.5) J5(-3.5,-0.5) J6(-2.5,-0.5) J7(-1.5,-0.5) J8(-0.5,-0.5) J9(0.5,-0.5) J10(1.5,-0.5) J11(2.5,-0.5) J12(3.5,-0.5) J13(4.5,-0.5) J14(5.5,-0.5) J15(6.5,-0.5) J16(7.5,-0.5) K1(-7.5,-1.5) K2(-6.5,-1.5) K3(-5.5,-1.5) K4(-4.5,-1.5) K5(-3.5,-1.5) K6(-2.5,-1.5) K7(-1.5,-1.5) K8(-0.5,-1.5) K9(0.5,-1.5) K10(1.5,-1.5) K11(2.5,-1.5) K12(3.5,-1.5) K13(4.5,-1.5) K14(5.5,-1.5) K15(6.5,-1.5) K16(7.5,-1.5) L1(-7.5,-2.5) L2(-6.5,-2.5) L3(-5.5,-2.5) L4(-4.5,-2.5) L5(-3.5,-2.5) L6(-2.5,-2.5) L7(-1.5,-2.5) L8(-0.5,-2.5) L9(0.5,-2.5) L10(1.5,-2.5) L11(2.5,-2.5) L12(3.5,-2.5) L13(4.5,-2.5) L14(5.5,-2.5) L15(6.5,-2.5) L16(7.5,-2.5) M1(-7.5,-3.5) M2(-6.5,-3.5) M3(-5.5,-3.5) M4(-4.5,-3.5) M5(-3.5,-3.5) M6(-2.5,-3.5) M7(-1.5,-3.5) M8(-0.5,-3.5) M9(0.5,-3.5) M10(1.5,-3.5) M11(2.5,-3.5) M12(3.5,-3.5) M13(4.5,-3.5) M14(5.5,-3.5) M15(6.5,-3.5) M16(7.5,-3.5) N1(-7.5,-4.5) N2(-6.5,-4.5) N3(-5.5,-4.5) N4(-4.5,-4.5) N5(-3.5,-4.5) N6(-2.5,-4.5) N7(-1.5,-4.5) N8(-0.5,-4.5) N9(0.5,-4.5) N10(1.5,-4.5) N11(2.5,-4.5) N12(3.5,-4.5) N13(4.5,-4.5) N14(5.5,-4.5) N15(6.5,-4.5) N16(7.5,-4.5) P1(-7.5,-5.5) P2(-6.5,-5.5) P3(-5.5,-5.5) P4(-4.5,-5.5) P5(-3.5,-5.5) P6(-2.5,-5.5) P7(-1.5,-5.5) P8(-0.5,-5.5) P9(0.5,-5.5) P10(1.5,-5.5) P11(2.5,-5.5) P12(3.5,-5.5) P13(4.5,-5.5) P14(5.5,-5.5) P15(6.5,-5.5) P16(7.5,-5.5) R1(-7.5,-6.5) R2(-6.5,-6.5) R3(-5.5,-6.5) R4(-4.5,-6.5) R5(-3.5,-6.5) R6(-2.5,-6.5) R7(-1.5,-6.5) R8(-0.5,-6.5) R9(0.5,-6.5) R10(1.5,-6.5) R11(2.5,-6.5) R12(3.5,-6.5) R13(4.5,-6.5) R14(5.5,-6.5) R15(6.5,-6.5) R16(7.5,-6.5) T1(-7.5,-7.5) T2(-6.5,-7.5) T3(-5.5,-7.5) T4(-4.5,-7.5) T5(-3.5,-7.5) T6(-2.5,-7.5) T7(-1.5,-7.5) T8(-0.5,-7.5) T9(0.5,-7.5) T10(1.5,-7.5) T11(2.5,-7.5) T12(3.5,-7.5) T13(4.5,-7.5) T14(5.5,-7.5) T15(6.5,-7.5) T16(7.5,-7.5)
  silkscreen extent -9.27,-8.5 8.5,8.5

## Part data
C1.DSPA C1.DSPB C1.DSPC C1.DSPD C2.DSPA C2.DSPB C2.DSPC C2.DSPD C3.DSPA C3.DSPB C3.DSPC C3.DSPD C4.DSPA C4.DSPB C4.DSPC C4.DSPD C5.DSPA C5.DSPB C5.DSPC C5.DSPD C6.DSPA C6.DSPB C6.DSPC C6.DSPD C7.DSPB C7.DSPC C7.DSPD C8.DSPB C8.DSPC C8.DSPD C9.DSPA C9.DSPB C9.DSPC C9.DSPD C10.DSPA C10.DSPB C10.DSPC C10.DSPD C11.DSPB C11.DSPC C11.DSPD C12.DSPA C12.DSPB C12.DSPC C12.DSPD C13 C14 C21 C29 C30 C31 C32 C33 C34 C35 C36 C37 C38 C39 C40 C41 C42 C43 C44 C45 C46 C47 C48 C49 C50 C51 C52 C53 C54 C55 C57.FiberIO1 C57.FiberIO2 C58.FiberIO1 C58.FiberIO2 C59.DSPA C59.DSPB C59.DSPC C59.DSPD C60.DSPA C60.DSPB C60.DSPC C60.DSPD C61.DSPA C61.DSPB C61.DSPC C61.DSPD C62.DSPA C62.DSPB C62.DSPC C62.DSPD: "Capacitor"
C15 C16 C27 C28: library part Cap, "Capacitor"
C17 C18 C19 C20 C22 C23 C24 C25: library part "Cap Pol3", "Tantalum Bypass cap"
C26: library part "Cap Pol1", "Polarized Capacitor (Radial)"
C56.FiberIO1 C56.FiberIO2: library part Cap2, "Capacitor"
DS1.DSPA DS1.DSPB DS1.DSPC DS1.DSPD: library part LED3, "Typical BLUE SiC LED"
DS2 DS3 DS4 DS5: "Typical BLUE SiC LED"
IO1: library part SATA-23
JP1 P2: "Header, 7-Pin, Dual row"
O1: "ECS SMD Oscillator, ECS-3953M"
O2.FiberIO1 O2.FiberIO2: "Low-cost fiber transmitter"
O3.FiberIO1 O3.FiberIO2: "Low-cost fiber receiver"
P1.DSPA P1.DSPB P1.DSPC P1.DSPD: "Header, 3-Pin"
R1.DSPA R1.DSPB R1.DSPC R1.DSPD R7 R7.DSPA R7.DSPB R7.DSPC R7.DSPD R8 R9 R10 R16 R17 R18 R19 R20 R21: library part Res1, "Resistor"
R2.DSPA R2.DSPB R2.DSPC R2.DSPD R3.DSPA R3.DSPB R3.DSPC R3.DSPD R4.DSPA R4.DSPB R4.DSPC R4.DSPD R5.DSPA R5.DSPB R5.DSPC R5.DSPD R6.DSPA R6.DSPB R6.DSPC R6.DSPD R11 R12 R13 R14 R15 R22.FiberIO1 R22.FiberIO2 R23.FiberIO1 R23.FiberIO2 R24.FiberIO1 R24.FiberIO2 R25.FiberIO1 R25.FiberIO2: "Resistor"
U1.DSPA U1.DSPB U1.DSPC U1.DSPD: library part ADSP-BF53x-PBGA169, "Analog Devices Blackfin"
U2.DSPA U2.DSPB U2.DSPC U2.DSPD: library part MT48LC16M16A2TG, "Micron 16Mbitx16 SDRAM"
U3: library part XC3S200-FT256, "Xilinx Spartan-3 FPGA"
U4 U11: library part SN54LVC07A
U5: "30-66 MHz 10-Bit Bus LVDS Deserializer"
U6: library part PTH03000
U7 U8: library part TPS786XX, "TI 1.5A LDO"
U9: library part XC2C64A-5VQ44C
U10.FiberIO1 U10.FiberIO2: "Dual Peripheral Driver"

## Via types
v1: diameter 24, hole 10, Top Layer to Bottom Layer, 133 vias

## Nets (pads, with @x,y where several pads share a name; then routed paths per layer and width w, separated by ;. In a path a pad name is that pad's centre, name@x,y a point inside that pad or via, vN(x,y) a via of type N, cw(c..) or ccw(c..) an arc to the next point about the centre after c; other vN are vias at no path point)
+1.2VCC: C1.DSPA.2 C1.DSPB.2 C1.DSPC.2 C1.DSPD.2 C2.DSPA.2 C2.DSPB.2 C2.DSPC.2 C2.DSPD.2 C3.DSPA.2 C3.DSPB.2 C3.DSPC.2 C3.DSPD.2 C4.DSPA.2 C4.DSPB.2 C4.DSPC.2 C4.DSPD.2 C22.1 C23.1 C24.1 C25.1 C42.2 C43.2 C44.2 C45.2 U1.DSPA.F12 U1.DSPA.G12 U1.DSPA.H12 U1.DSPA.J12 U1.DSPA.K12 U1.DSPA.L12 U1.DSPA.M10 U1.DSPA.M11 U1.DSPA.M12 U1.DSPB.F12 U1.DSPB.G12 U1.DSPB.H12 U1.DSPB.J12 U1.DSPB.K12 U1.DSPB.L12 U1.DSPB.M10 U1.DSPB.M11 U1.DSPB.M12 U1.DSPC.F12 U1.DSPC.G12 U1.DSPC.H12 U1.DSPC.J12 U1.DSPC.K12 U1.DSPC.L12 U1.DSPC.M10 U1.DSPC.M11 U1.DSPC.M12 U1.DSPD.F12 U1.DSPD.G12 U1.DSPD.H12 U1.DSPD.J12 U1.DSPD.K12 U1.DSPD.L12 U1.DSPD.M10 U1.DSPD.M11 U1.DSPD.M12 U3.D4 U3.D13 U3.E5 U3.E12 U3.M5 U3.M12 U3.N4 U3.N13 U6.5 | length 580.7
  Top Layer w7: v1@3106.3,4685.04 v1(3118.11,4685.04) ; v1(3118.11,4645.67) U1.DSPA.G12@3149.61,4645.67 ; v1(3122.05,4606.3) U1.DSPA.F12@3149.61,4606.3 ; U1.DSPA.K12@3145.67,4763.78 U1.DSPA.K12@3149.61,4763.78 v1(3125.98,4787.4) 3141.73,4803.15 U1.DSPA.L12@3149.61,4803.15 ; U1.DSPA.H12@3149.61,4685.04 v1(3118.11,4685.04) ; U1.DSPA.J12@3149.61,4724.41 3125.98,4724.41 3118.11,4716.54 v1(3118.11,4685.04) ; U1.DSPA.M12@3149.61,4842.52 v1(3149.61,4870.08) ; U1.DSPA.M11@3188.98,4842.52 v1(3188.98,4874.02) ; U1.DSPA.M10@3228.35,4842.52 v1(3228.35,4874.02)
  Mid-Layer 1 w7: v1@3106.3,4685.04 v1(3118.11,4685.04)
  Bottom Layer w7: C4.DSPA.2@3078.68,4714.57 3088.58,4714.57 v1(3118.11,4685.04) ; C2.DSPA.2@3116.08,4566.93 3116.08,4600.33 v1(3122.05,4606.3) ; v1(3125.98,4787.4) 3131.95,4793.37 C3.DSPA.2@3131.95,4822.83 ; v1(3188.98,4874.02) 3188.98,4905.51 C1.DSPA.2@3204.72,4921.26 3204.72,4897.64 v1(3228.35,4874.02)
+1.8VCC: C16.2 C30.2 U7.4 U9.15
+2.5VCC: C28.2 C46.2 C47.2 C48.2 C49.2 C50.2 C51.2 C52.2 C53.2 C54.2 C55.2 U3.A6 U3.A11 U3.F1 U3.F16 U3.J5 U3.J6 U3.K6 U3.L1 U3.L16 U3.T6 U3.T11 U8.4
+5VCC: C56.FiberIO1.1 C56.FiberIO2.1 C57.FiberIO1.1 C57.FiberIO2.1 IO1.P7 IO1.P8 IO1.P9 R22.FiberIO1.2 R22.FiberIO2.2 R23.FiberIO1.2 R23.FiberIO2.2 R25.FiberIO1.1 R25.FiberIO2.1 U10.FiberIO1.1 U10.FiberIO1.8 U10.FiberIO2.1 U10.FiberIO2.8
DSP0RX+: IO1.6 U3.L2
DSP0RX-: IO1.5 U3.L3
DSP0TX+: IO1.2 R8.2 R9.2 U5.5
DSP0TX-: IO1.3 R9.1 R10.2 U5.6
DSPA_CLK: U1.DSPA.A14 U3.F5
DSPA_DR0PRI: U1.DSPA.M2 U3.G2 U3.H1
DSPA_DR0SEC: U1.DSPA.M1 U3.G1 U3.G5
DSPA_DTOPRI: U1.DSPA.K2 U3.D1
DSPA_DTOSEC: U1.DSPA.K1 U3.D2
DSPA_FLAG0: U1.DSPA.C1 U3.E3
DSPA_FLAG1: U1.DSPA.B1 U3.E1
DSPA_FLAG4: U1.DSPA.A1 U3.E2
DSPA_FS3: U1.DSPA.C2
DSPA_MISO: R1.DSPA.1 U1.DSPA.E2 U3.C1 | length 206.9
  Top Layer w7: U1.DSPA.E2@3543.31,4566.93 3562.99,4586.61 3708.66,4586.61 R1.DSPA.1@3732.28,4610.24
DSPA_MOSI: U1.DSPA.E1 U3.C2
DSPA_PPICLK: U3.F4
DSPA_RESET: U1.DSPA.A12 U3.D3
DSPA_RFS0: U1.DSPA.N1 U3.G3 U3.H3
DSPA_RSCLK0: U1.DSPA.N2 U3.G4 U3.H4
DSPA_SCK: U1.DSPA.D1 U3.C3
DSPA_SS: R7.DSPA.2 U1.DSPA.D2 U3.B1 | length 310.6
  Top Layer w7: U1.DSPA.D2@3543.31,4527.56 3562.99,4547.24 3767.72,4547.24 3799.21,4578.74 R7.DSPA.2@3799.21,4612.2
DSPA_TFS0: U1.DSPA.L1 U3.F2
DSPA_TSCLK0: U1.DSPA.L2 U3.F3
DSPB_CLK: U1.DSPB.A14 U3.D5
DSPB_DR0PRI: U1.DSPB.M2 U3.A10 U3.D7
DSPB_DR0SEC: U1.DSPB.M1 U3.D6 U3.E7
DSPB_DTOPRI: U1.DSPB.K2 U3.A8
DSPB_DTOSEC: U1.DSPB.K1 U3.B4
DSPB_FLAG0: U1.DSPB.C1 U3.B8
DSPB_FLAG1: U1.DSPB.B1 U3.B6
DSPB_FLAG4: U1.DSPB.A1 U3.B7
DSPB_FS3: U1.DSPB.C2
DSPB_MISO: R1.DSPB.1 U1.DSPB.E2 U3.A4
DSPB_MOSI: U1.DSPB.E1 U3.A5
DSPB_PPICLK: U3.C8
DSPB_RESET: U1.DSPB.A12 U3.B5
DSPB_RFS0: U1.DSPB.N1 U3.A12 U3.D8
DSPB_RSCLK0: U1.DSPB.N2 U3.A13 U3.E6
DSPB_SCK: U1.DSPB.D1 U3.A7
DSPB_SS: R7.DSPB.2 U1.DSPB.D2 U3.A3
DSPB_TFS0: U1.DSPB.L1 U3.C6
DSPB_TSCLK0: U1.DSPB.L2 U3.C7
DSPC_CLK: U1.DSPC.A14 U3.G12
DSPC_DR0PRI: U1.DSPC.M2 U3.G14 U3.H14
DSPC_DR0SEC: U1.DSPC.M1 U3.G13 U3.H13
DSPC_DTOPRI: U1.DSPC.K2 U3.D15
DSPC_DTOSEC: U1.DSPC.K1 U3.D16
DSPC_FLAG0: U1.DSPC.C1 U3.E16
DSPC_FLAG1: U1.DSPC.B1 U3.E14
DSPC_FLAG4: U1.DSPC.A1 U3.E15
DSPC_FS3: U1.DSPC.C2
DSPC_MISO: R1.DSPC.1 U1.DSPC.E2 U3.C15
DSPC_MOSI: U1.DSPC.E1 U3.C16
DSPC_PPICLK: U3.F15
DSPC_RESET: U1.DSPC.A12 U3.E13
DSPC_RFS0: U1.DSPC.N1 U3.G15 U3.H15
DSPC_RSCLK0: U1.DSPC.N2 U3.G16 U3.H16
DSPC_SCK: U1.DSPC.D1 U3.D14
DSPC_SS: R7.DSPC.2 U1.DSPC.D2 U3.B16
DSPC_TFS0: U1.DSPC.L1 U3.F13
DSPC_TSCLK0: U1.DSPC.L2 U3.F14
DSPD_CLK: U1.DSPD.A14 U3.N14
DSPD_DR0PRI: U1.DSPD.M2 U3.N16 U3.R16
DSPD_DR0SEC: U1.DSPD.M1 U3.N15 U3.P16
DSPD_DTOPRI: U1.DSPD.K2 U3.K15
DSPD_DTOSEC: U1.DSPD.K1 U3.K16
DSPD_FLAG0: U1.DSPD.C1 U3.L15
DSPD_FLAG1: U1.DSPD.B1 U3.L13
DSPD_FLAG4: U1.DSPD.A1 U3.L14
DSPD_FS3: U1.DSPD.C2
DSPD_MISO: R1.DSPD.1 U1.DSPD.E2 U3.K12
DSPD_MOSI: U1.DSPD.E1 U3.K13
DSPD_PPICLK: U3.M16
DSPD_RESET: U1.DSPD.A12 U3.L12
DSPD_RFS0: U1.DSPD.N1 U3.J13 U3.P14
DSPD_RSCLK0: U1.DSPD.N2 U3.J14 U3.P15
DSPD_SCK: U1.DSPD.D1 U3.K14
DSPD_SS: R7.DSPD.2 U1.DSPD.D2 U3.J16
DSPD_TFS0: U1.DSPD.L1 U3.M14
DSPD_TSCLK0: U1.DSPD.L2 U3.M15
DSPE\M\U\: P2.2 U4.4
DSPT\R\S\T\: P2.10 U4.5